# Altium PCB SmallHandheldRev1.PcbDoc (part 1 of 2)
Units mm, origin at the board's own origin, x right, y up, seen from the top; angles counter-clockwise.
Board outline 50.04 x 64.01 mm, 6 copper layers (TopLayer, MidLayer1, MidLayer2, MidLayer3, MidLayer4, BottomLayer); 248 components, 164 nets, 692 pads, 230 vias.
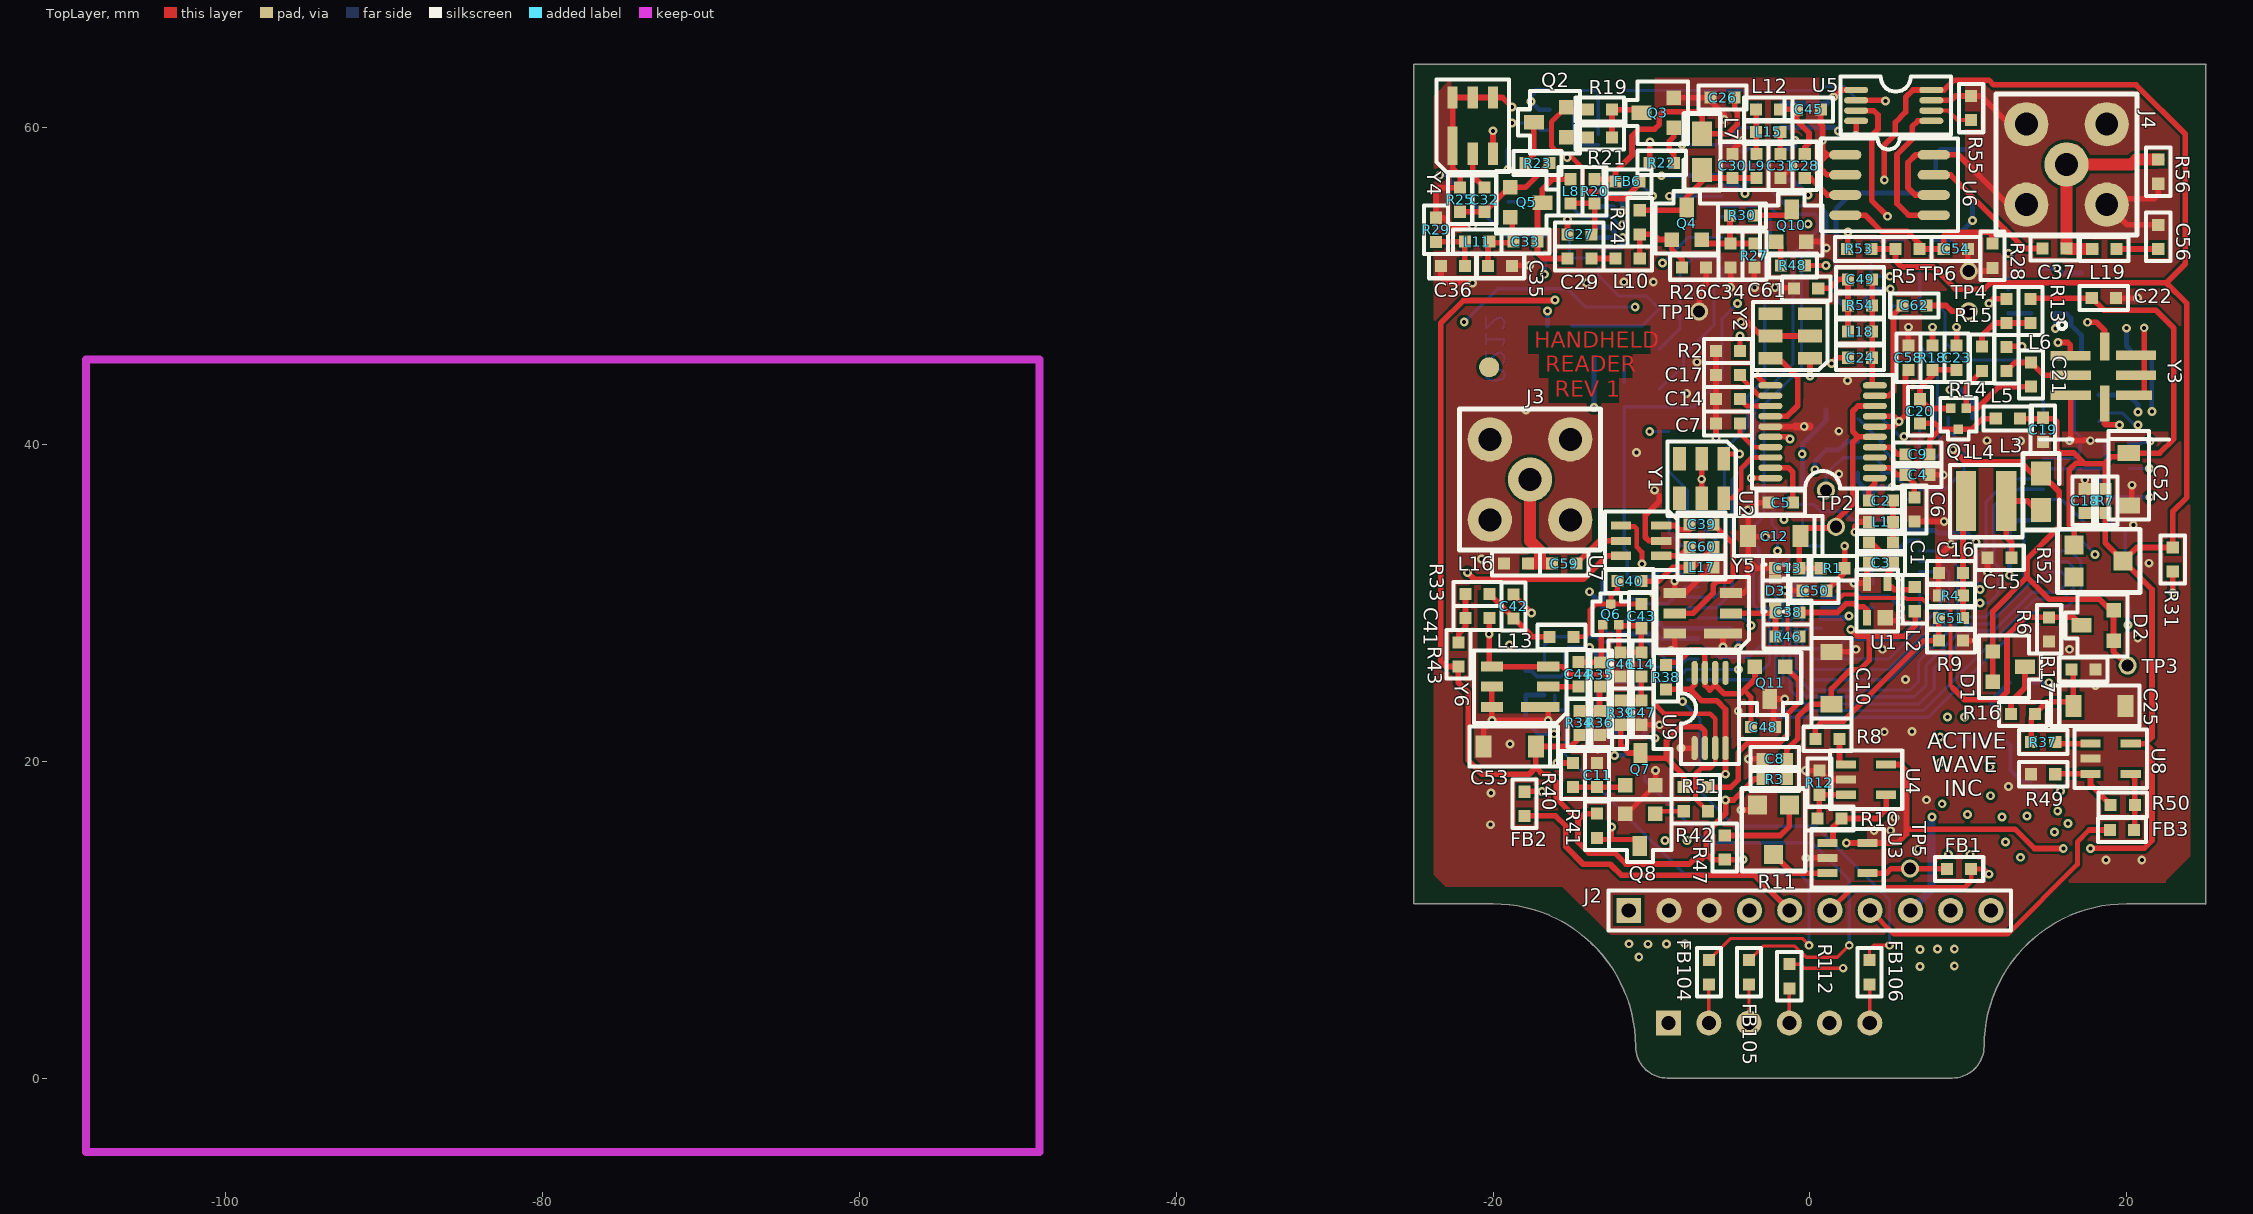
[diagram p0: TopLayer view]
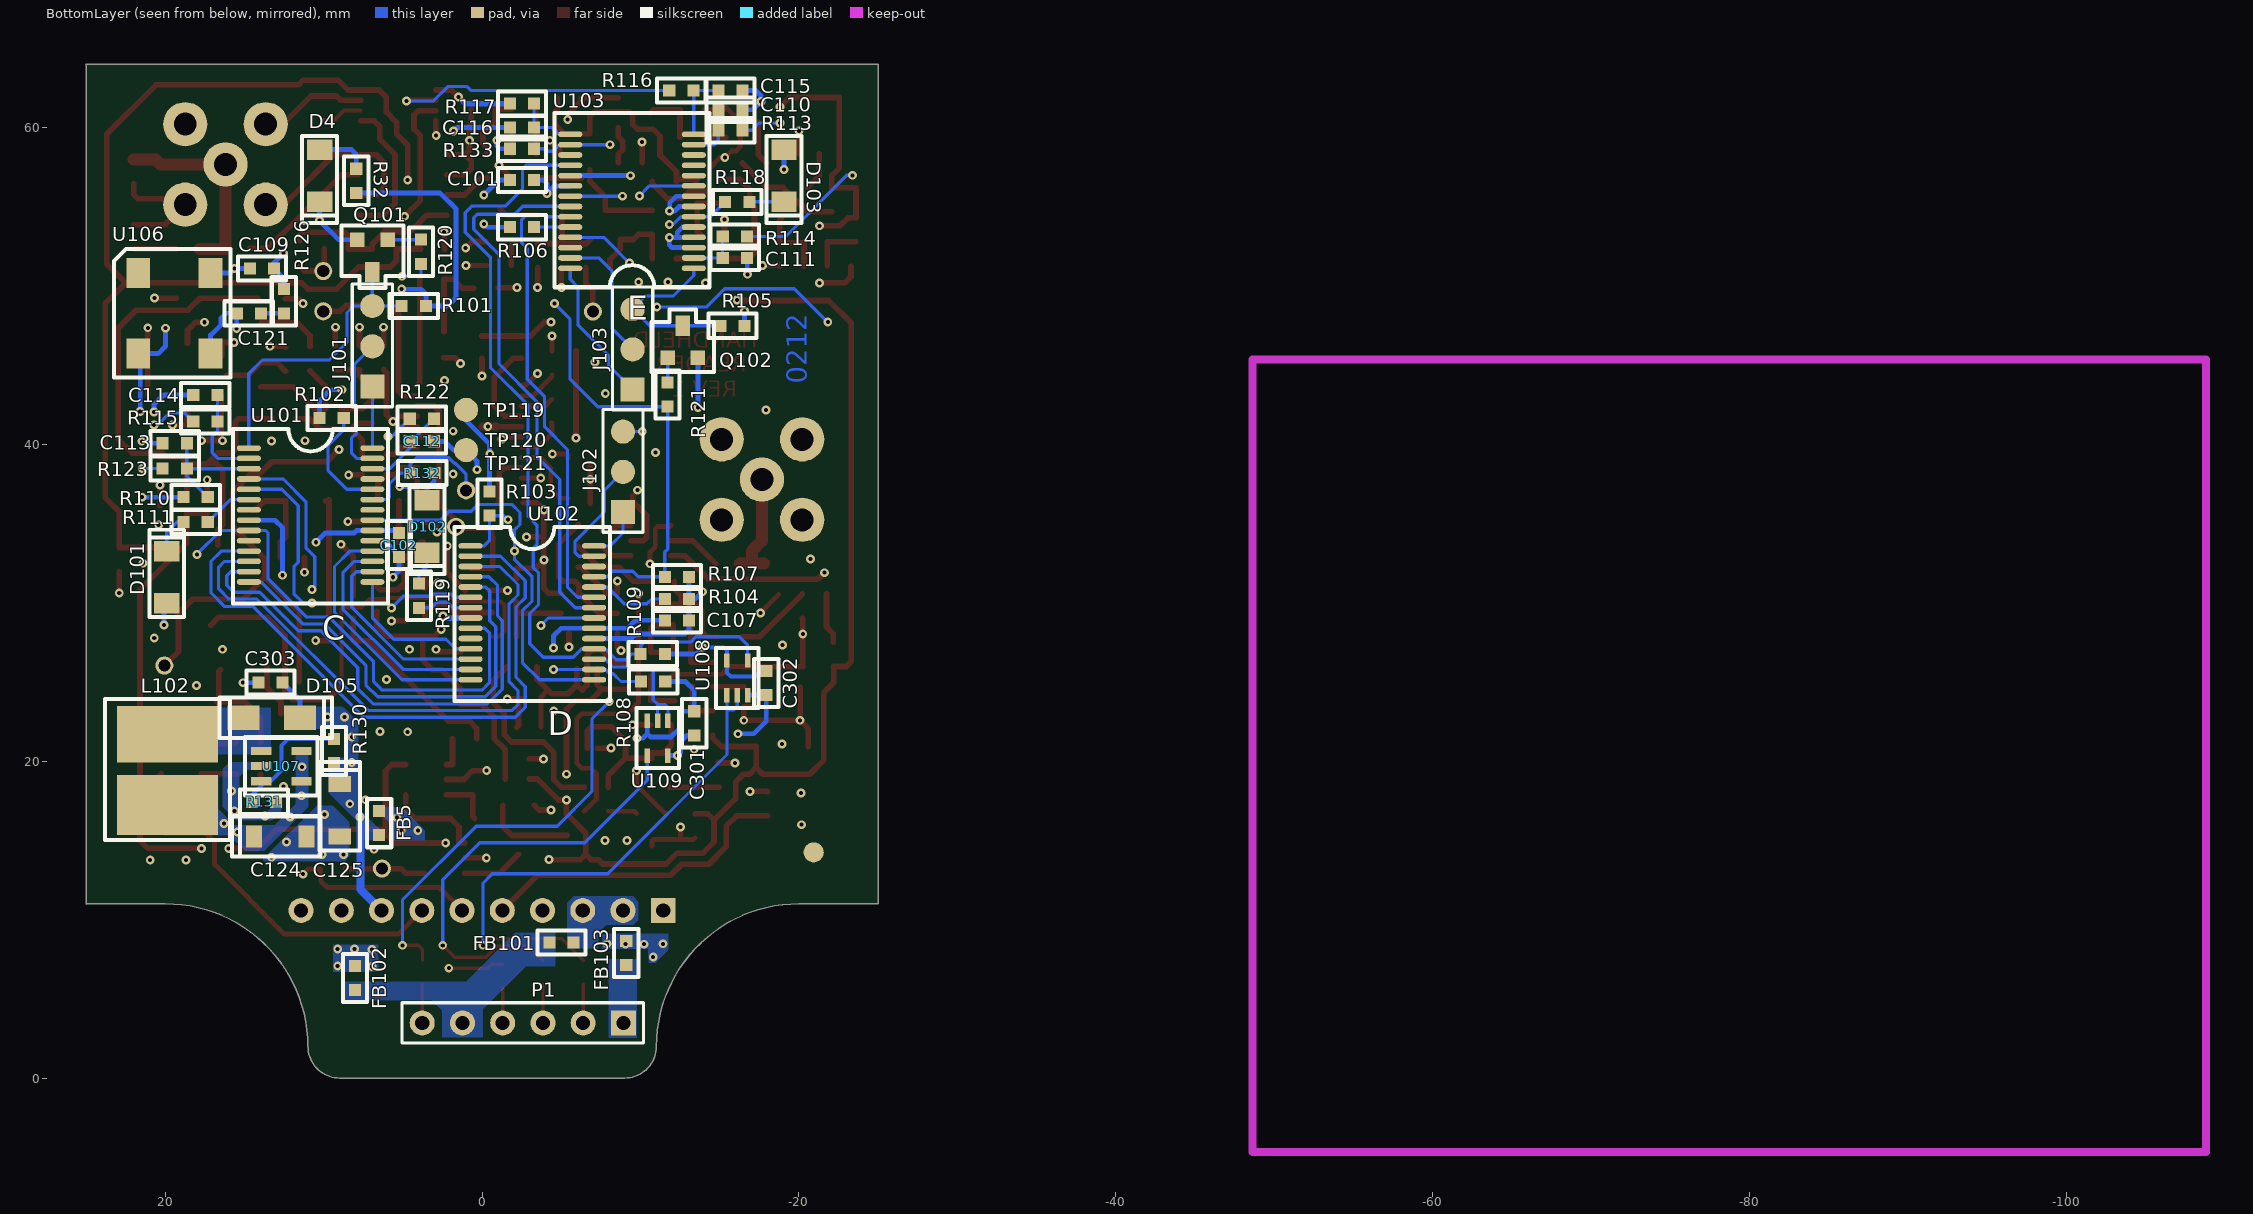
[diagram p1: BottomLayer view, seen from below]
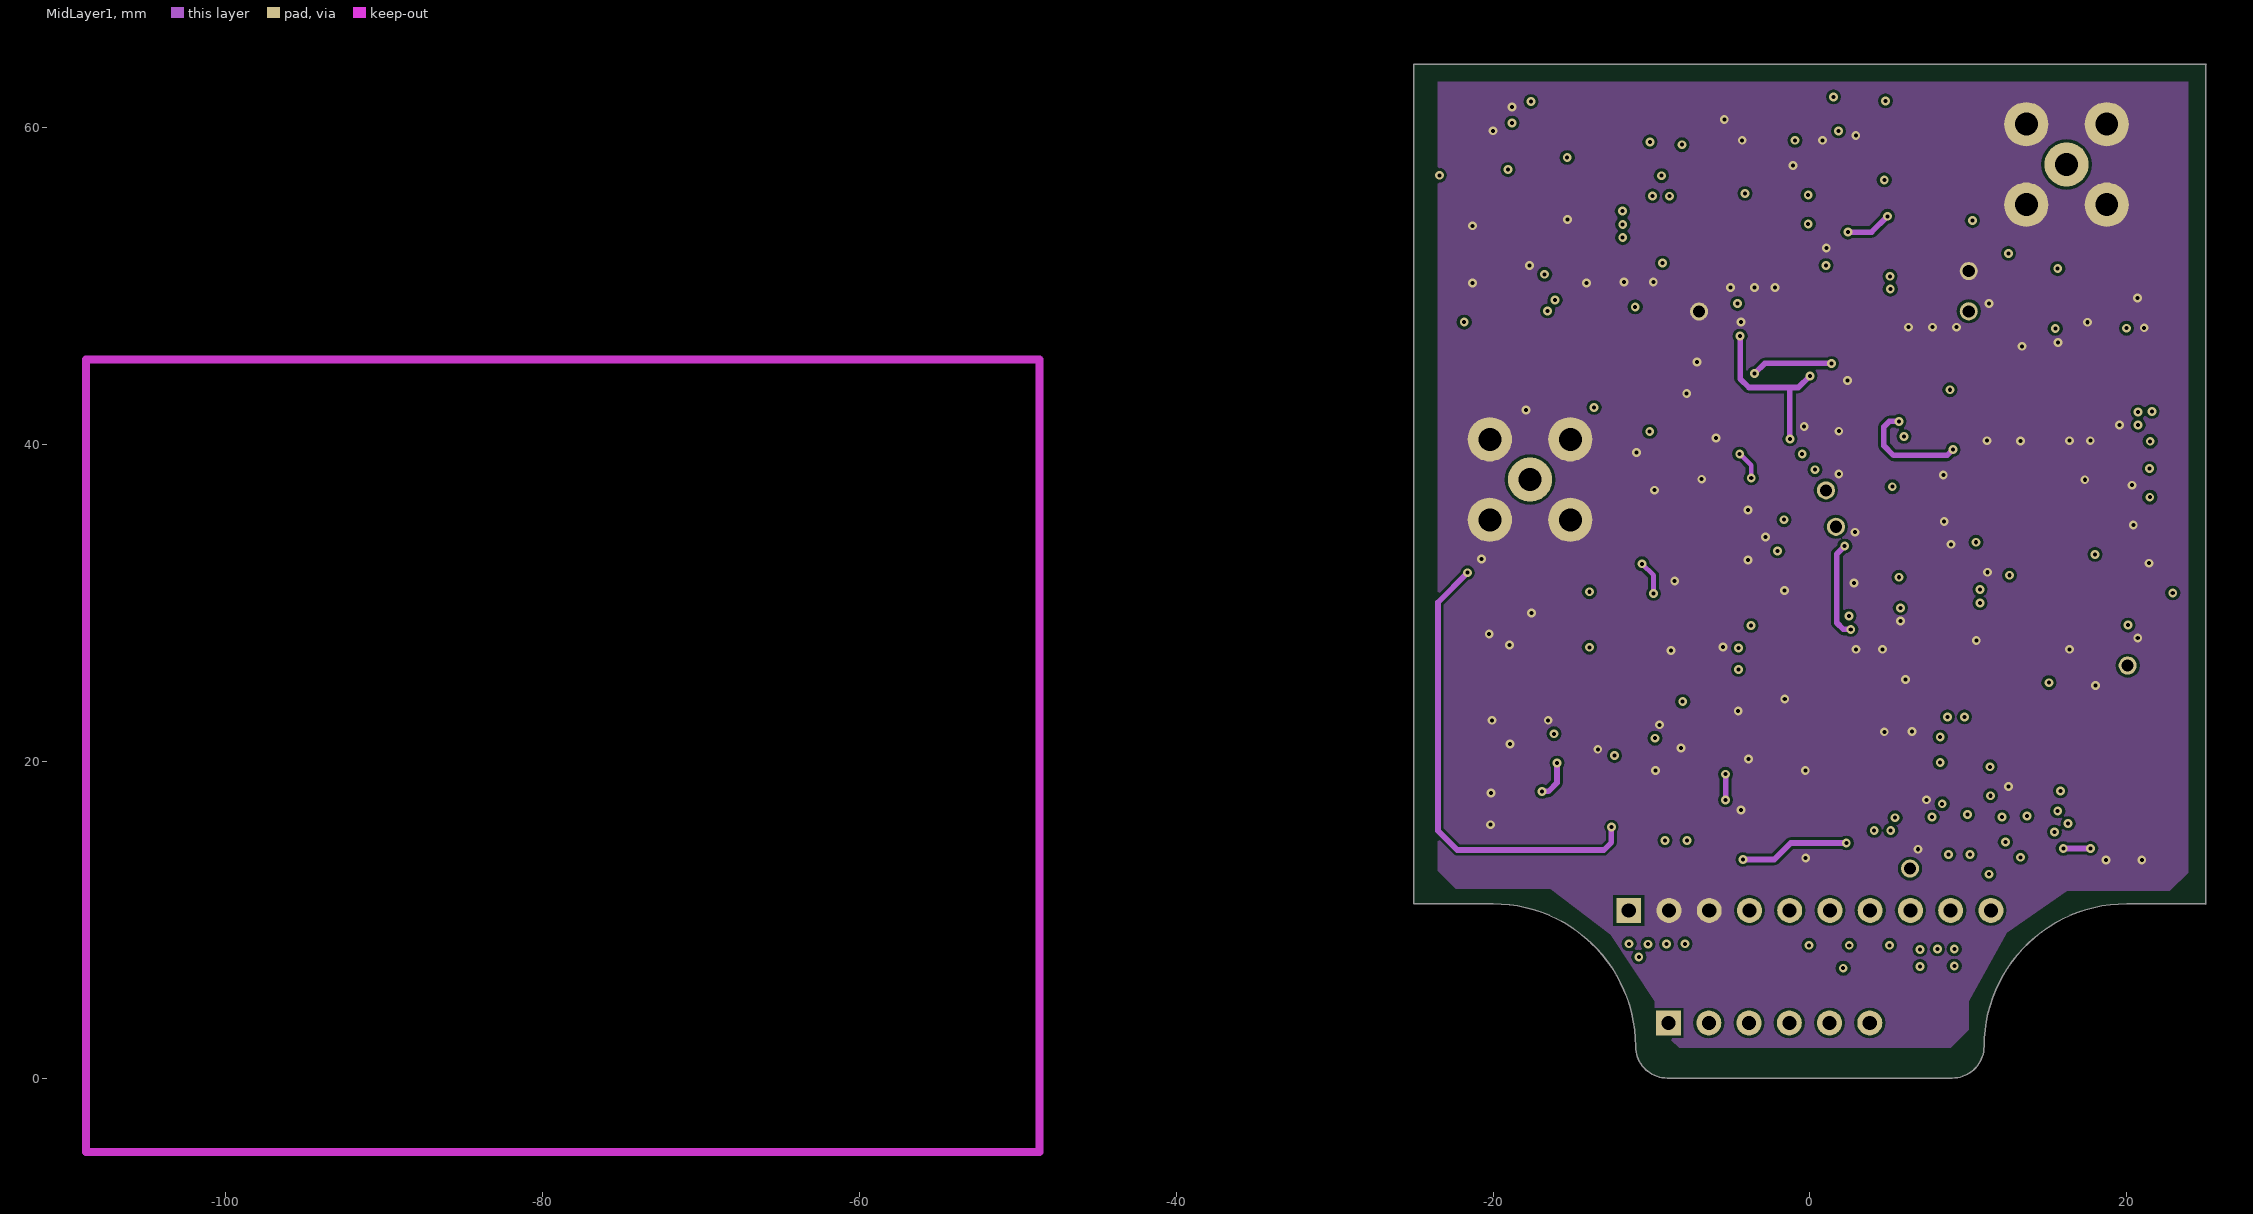
[diagram p2: MidLayer1]
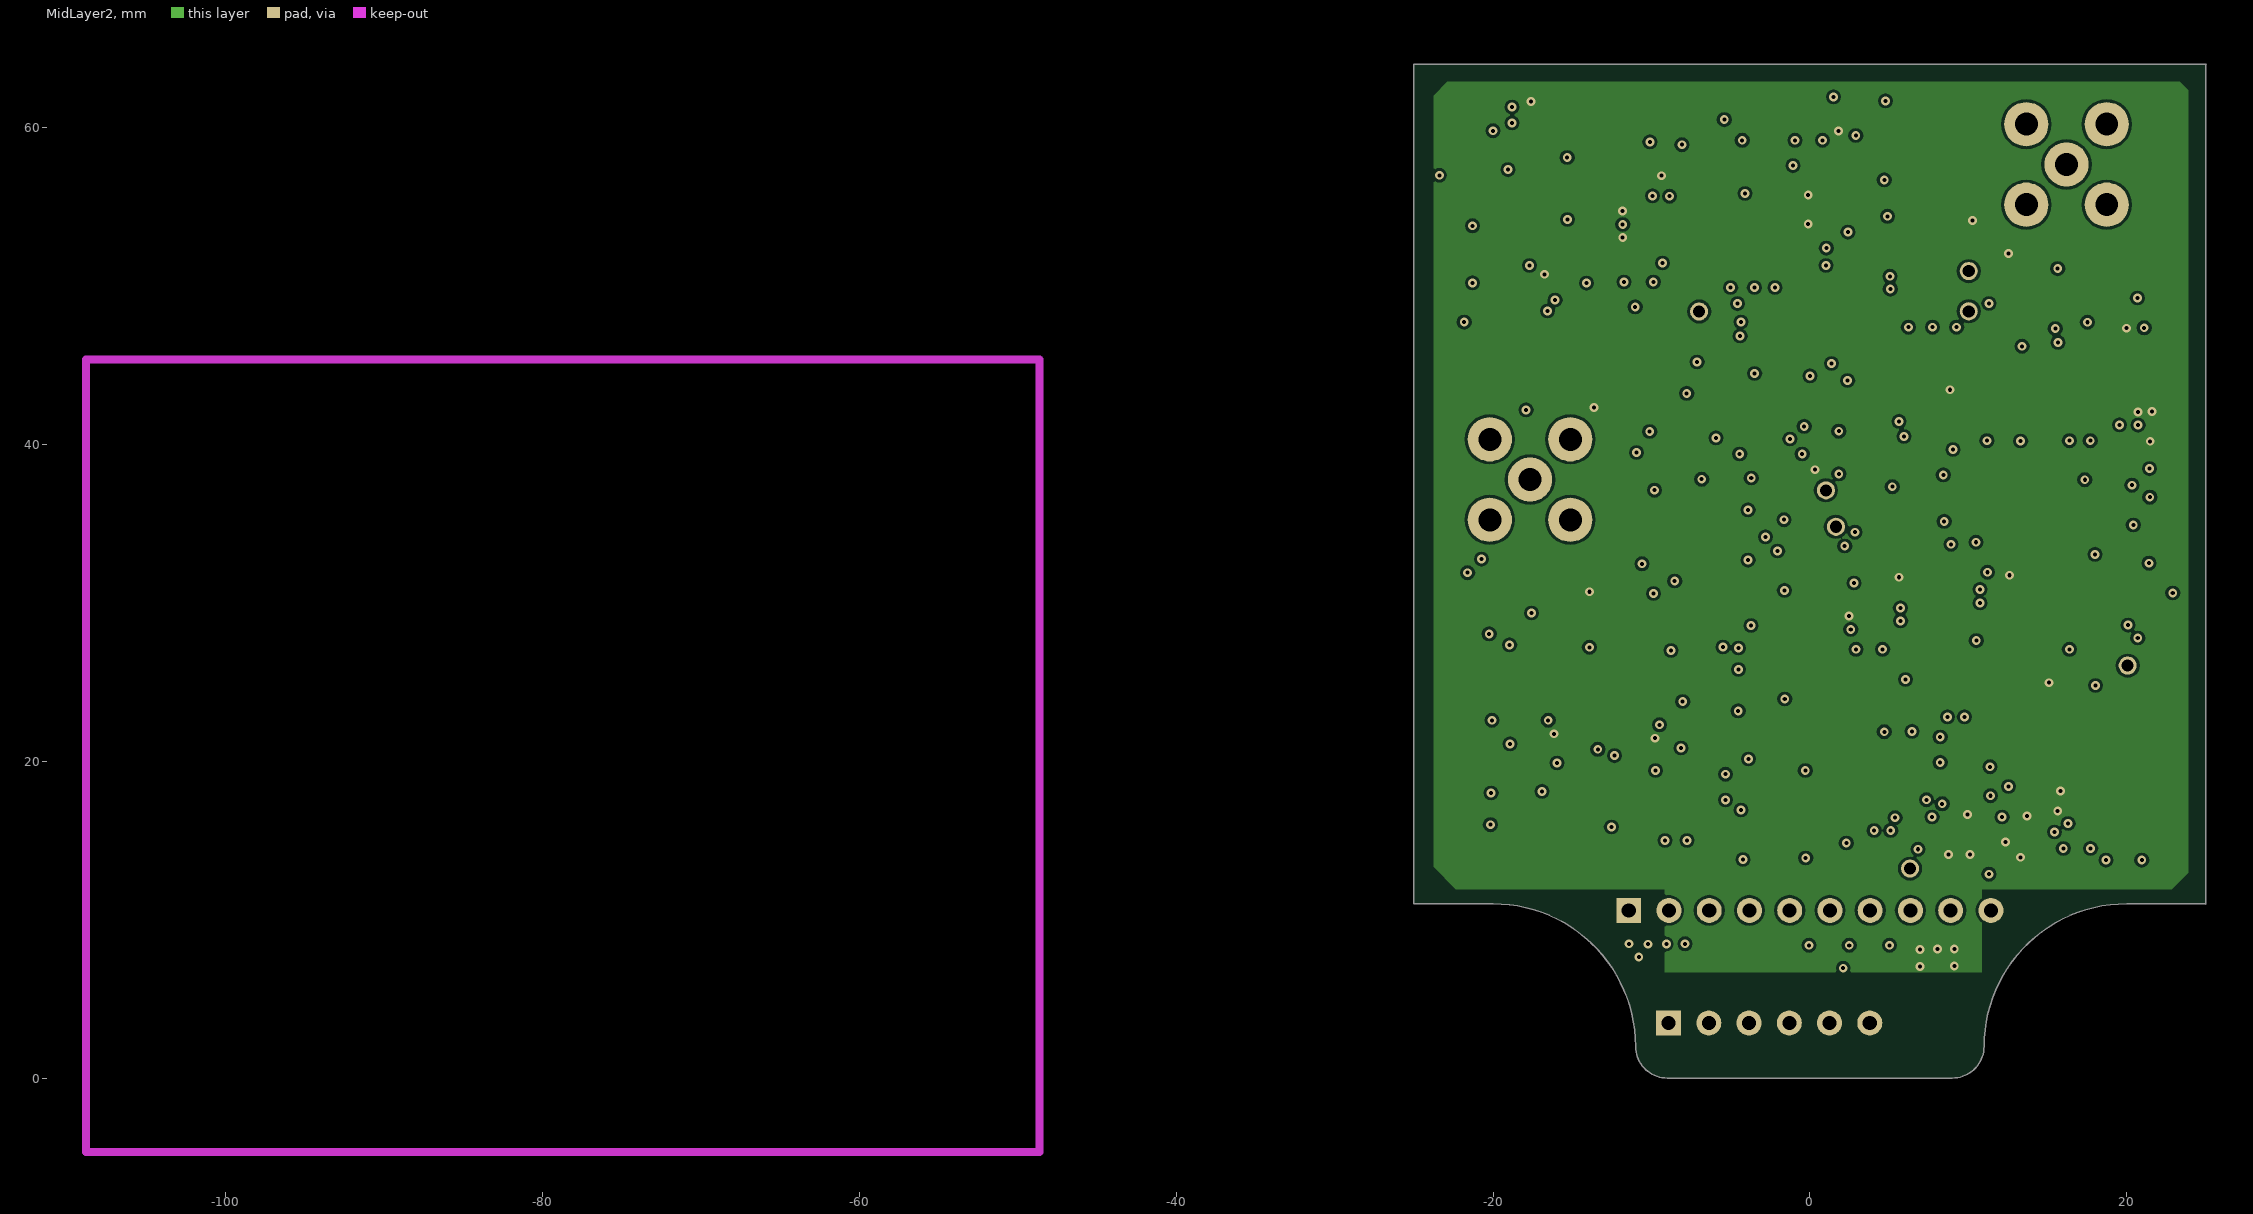
[diagram p3: MidLayer2]
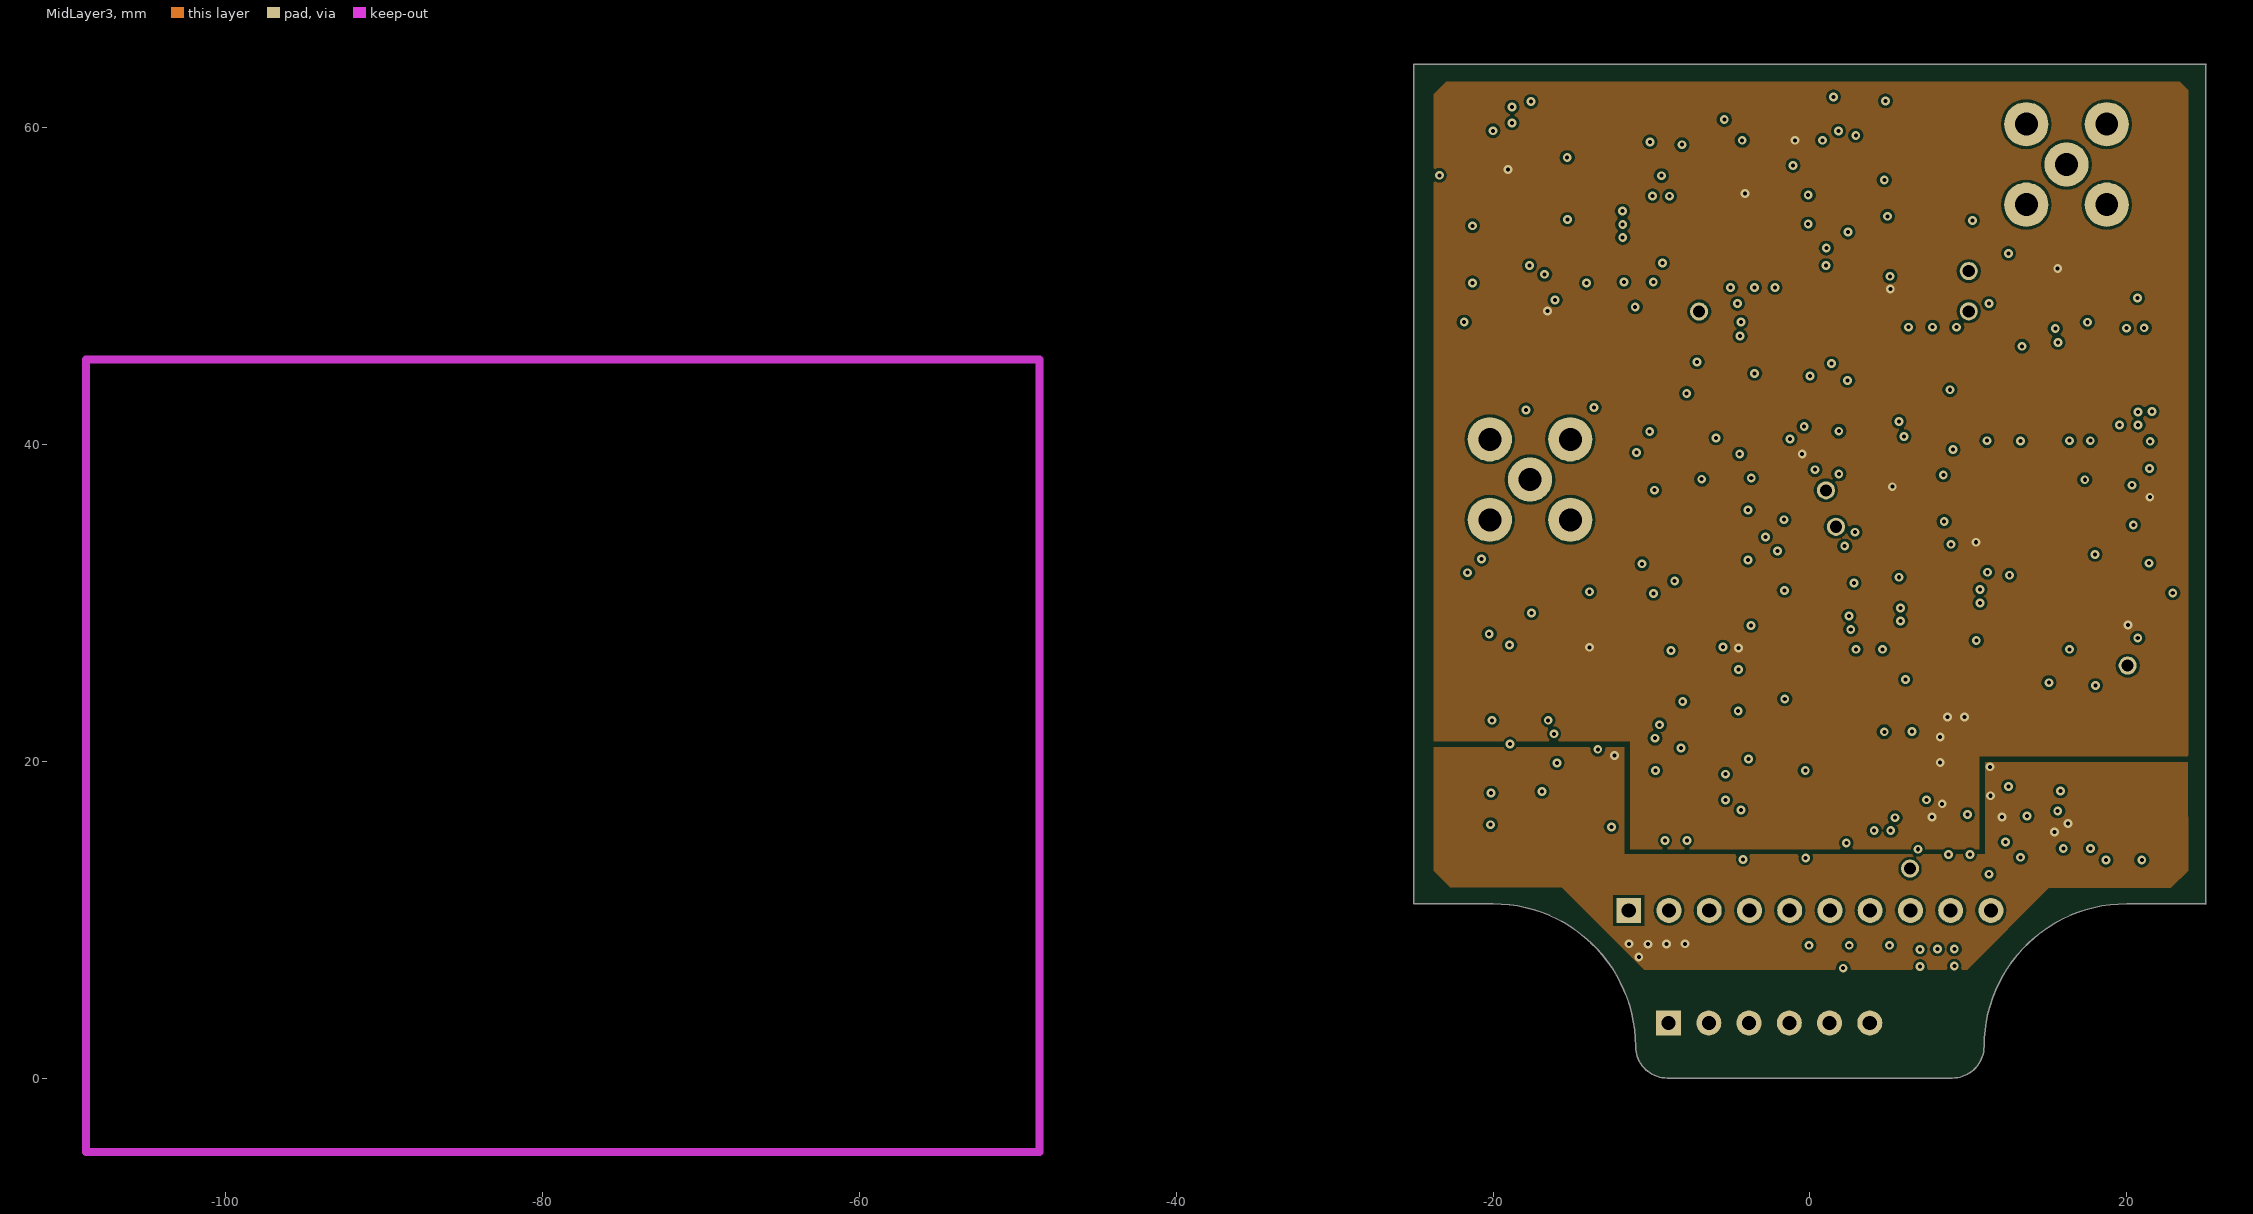
[diagram p4: MidLayer3]
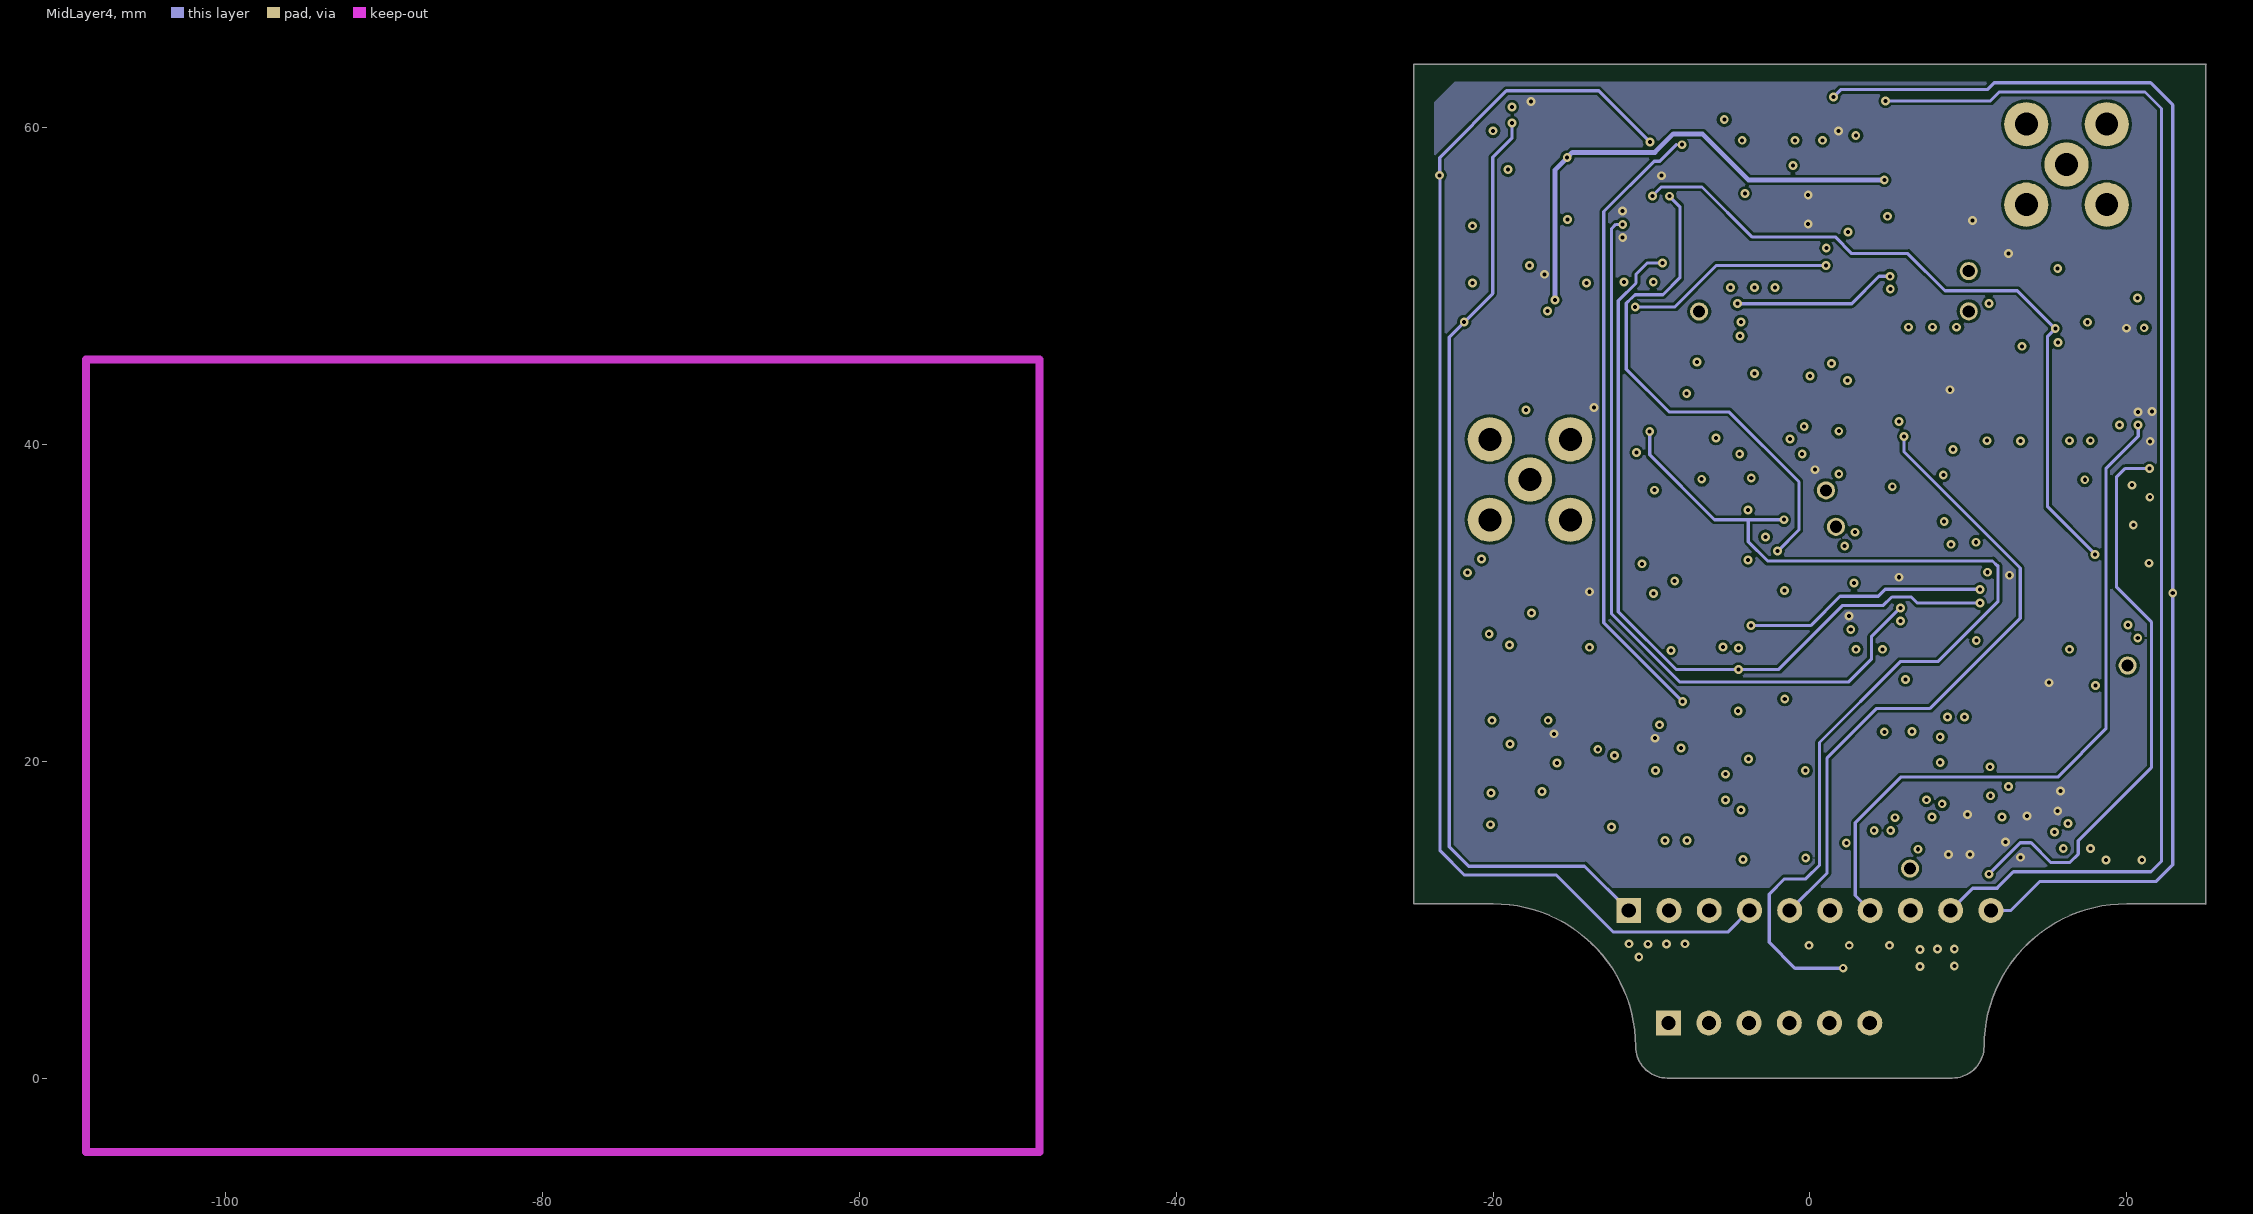
[diagram p5: MidLayer4]

## Layer stack, top to bottom
TopLayer: signal copper 0.0356
Dielectric: core 0.32, FR-4, Dk 4.8
MidLayer1: signal copper 0.0356
Dielectric: prepreg 0.32, FR-4, Dk 4.8
MidLayer2: signal copper 0.0356
Dielectric: core 0.32, FR-4, Dk 4.8
MidLayer3: signal copper 0.0356
Dielectric: prepreg 0.32, FR-4, Dk 4.8
MidLayer4: signal copper 0.0356
Dielectric: core 0.32, FR-4, Dk 4.8
BottomLayer: signal copper 0.0356

## Board outline
-11,2 ccw(c-20,2) -20,11 -25.019,11 -25.019,64 25.019,64 25,64.008 25,10.979 25.006,11 20,11 ccw(c20,2) 11,2 cw(c9,2) 9,0 -9,0 cw(c-9,2)

## Design rules (kind name [scope] priority, off if disabled: settings)
Clearance Clearance_1 [InNet('GND_SIGNAL')] p1 off: gap=0.254
Clearance [All] p2: gap=0.178
ComponentClearance [All] p1 off: gap=0.254 collisioncheckmode=3 verticalgap=0.254 showdistances=FALSE
MinimumSolderMaskSliver [All] p1: minsoldermaskwidth=0.127
PolygonConnect [All] p1: connectstyle=Direct reliefconductorwidth=0.254 reliefentries=4 polygonreliefangle="90 Angle"
RoomDefinition "PG06_Schematic Sheet4" [InComponentClass('PG06_Schematic Sheet4')] p1: confinementstyle=ConfineIn formatcopy=TRUE lockcomponents=FALSE outline -43.663,-11.516 40.234,-11.516 40.234,91.685 -43.663,91.685
RoomDefinition "PG05_Schematic Sheet3" [InComponentClass('PG05_Schematic Sheet3')] p2: confinementstyle=ConfineIn formatcopy=TRUE lockcomponents=FALSE outline 26.128,6.274 31.128,6.274 31.128,12.474 26.128,12.474
RoomDefinition "PG04_Schematic Sheet2" [InComponentClass('PG04_Schematic Sheet2')] p3: confinementstyle=ConfineIn formatcopy=TRUE lockcomponents=FALSE outline -43.6,-11 40,-11 40,91.8 -43.6,91.8
RoomDefinition "PG03_Schematic Sheet1" [InComponentClass('PG03_Schematic Sheet1')] p4: confinementstyle=ConfineIn formatcopy=TRUE lockcomponents=FALSE outline 26.128,-2.026 29.528,-2.026 29.528,7.474 26.128,7.474
RoutingLayers [All] p1: top layer_v5=TRUE mid layer 1_v5=FALSE mid layer 2_v5=FALSE mid layer 3_v5=FALSE mid layer 4_v5=FALSE bottom layer_v5=TRUE
RoutingVias RoutingVias_1 [All] p1: holewidth=0.254 width=0.559 viastyle="Through Hole" minholewidth=0.254 minwidth=0.559 maxholewidth=0.254 maxwidth=0.559
SilkscreenOverComponentPads [All] p1: minsilkscreentomaskgap=0.254
SolderMaskExpansion [All] p1: expansion=0.102
TestPointUsage [All] p1: valid=0 allowmultiple=FALSE
Testpoint [All] p1: side=3 testpointundercomponent=TRUE minsize=1.016 maxsize=2.54 preferedsize=1.524 minholesize=0.508 maxholesize=1.016 preferedholesize=0.813 testpointgrid=0.025 style=297 order=0-112345678
Width [All] p1: maxlimit=2.54 minlimit=0.203 preferedwidth=0.254
20 further rules are at their usual default settings.

## Classes and differential pairs
component class "PG06_Schematic Sheet4": C101 C102 C107 C109 C110 C111 C112 C113 C114 C115 C116 C121 C124 C125 C301 C302 C303 D4 D101 D102 D103 D105 FB5 FB101 FB102 FB103 FB104 FB105 FB106 J101 J102 J103 L102 P1 Q101 Q102 R32 R101 R102 R103 R104 R105 R106 R107 R108 R109 R110 R111 R112 R113 R114 R115 R116 R117 R118 R119 R120 R121 R122 R123 R126 R130 R131 R132 R133 TP118 TP119 TP120 TP121 U101 U102 U103 U106 U107 U108 U109
component class "PG03_Schematic Sheet1": C1 C2 C3 C4 C5 C6 C7 C8 C9 C10 C12 C13 C14 C15 C16 C17 C18 C19 C20 C21 C22 C23 C24 C25 C49 C50 C51 C52 C58 C61 C62 D1 D2 L1 L2 L3 L4 L5 L6 L18 Q1 R1 R2 R3 R4 R6 R7 R8 R9 R10 R11 R12 R13 R14 R15 R16 R17 R18 R37 R47 R49 R50 R52 R54 TP1 TP2 TP3 TP4 TP5 TP6 U1 U2 U3 U4 U8 Y1 Y2 Y3
component class "PG04_Schematic Sheet2": C26 C27 C28 C29 C30 C31 C32 C33 C34 C35 C36 C37 C45 C54 C56 FB1 FB2 FB3 FB6 J2 J4 L7 L8 L9 L10 L11 L12 L15 L19 Q2 Q3 Q4 Q5 Q10 R5 R19 R20 R21 R22 R23 R24 R25 R26 R27 R28 R29 R30 R31 R48 R53 R55 R56 U5 U6 Y4
component class "PG05_Schematic Sheet3": C11 C38 C39 C40 C41 C42 C43 C44 C46 C47 C48 C53 C59 C60 D3 J3 L13 L14 L16 L17 Q6 Q7 Q8 Q11 R33 R34 R35 R36 R38 R39 R40 R41 R42 R43 R46 R51 U7 U9 Y5 Y6

## Components (designator, comment, footprint, x,y, rotation, side; value= is the part's Value field where it differs from the comment)
C1 "27 pF" 0603 3.726,33.81 r0 top
C2 "0.1uF" 0603 5.25,36.452 r180 top
C3 "5 pF" 0603 5.25,32.515 r180 top
C4 "0.1uF" 0603 7.562,38.077 r180 top
C5 ".1uF" 0603 -1.074,36.325 r180 top
C6 "100 pF" 0603 6.596,35.131 r90 top
C7 ".1uF" 0603 -4.402,41.33 r180 top
C8 ".1uF" 0603 -1.455,20.145 r180 top
C9 "0.5 pF" 0603 7.562,39.373 r180 top
C10 "10uF" "CAP A CASE" 1.364,23.599 r90 top
C11 "33 pF" 0603 -13.432,18.364 r90 top
C12 "10uF" "CAP A CASE" -0.592,34.217 r180 top
C13 ".1uF" 0603 -0.668,32.185 r180 top
C14 ".1uF" 0603 -4.402,42.854 r180 top
C15 "0.22" 0603 11.219,32.845 r0 top
C16 "0.001uF" 0603 8.146,31.88 r0 top
C17 ".1uF" 0603 -4.402,44.378 r180 top
C18 ".1uF" 0603 17.357,35.674 r90 top
C19 "22 pF" 0603 14.707,41.681 r270 top
C20 "0.5 pF" 0603 6.952,41.329 r90 top
C21 "100 pF" 0603 13.969,43.646 r90 top
C22 ".1uF" 0603 17.798,49.236 r0 top
C23 "3 pF" 0603 9.268,44.707 r90 top
C24 "1pF" 0603 3.934,45.469 r180 top
C25 "10uF" "CAP A CASE" 16.634,23.498 r0 top
C26 ".1uF" 0603 -4.75,61.89 r180 top
C27 "10 pF" 0603 -15.311,53.258 r0 top
C28 "4 pF" 0603 -0.318,56.82 r90 top
C29 "47 pF" 0603 -13.787,51.734 r180 top
C30 "10 pF" 0603 -4.89,56.82 r90 top
C31 "5 pF" 0603 -1.842,58.344 r270 top
C32 "100 pF" 0603 -20.543,56.213 r270 top
C33 "2 pF" 0603 -18.714,52.801 r0 top
C34 "100 pF" 0603 -5.017,52.68 r270 top
C35 "7 PF" 0603 -18.79,51.252 r180 top
C36 "100 pF" 0603 -21.762,51.252 r180 top
C37 "47 pF" 0603 16.205,52.365 r180 top
C38 "100 pF" 0603 -2.167,29.391 r0 top
C39 "100 pF" 0603 -7.598,34.953 r0 top
C40 "47 pF" 0603 -10.625,31.372 r180 top
C41 ".001uF" 0603 -21.738,29.032 r0 top
C42 "33 pF" 0603 -18.716,29.006 r90 top
C43 "3 pF" 0603 -10.638,29.921 r270 top
C44 "100 pF" 0603 -14.605,26.254 r270 top
C45 "3 pF" 0603 -0.824,61.147 r0 top
C46 "6 pF" 0603 -11.959,26.873 r270 top
C47 "100 pF" 0603 -10.638,22.301 r90 top
C48 ".1uF" 0603 -3.716,22.152 r0 top
C49 "39pF" 0603 3.934,50.422 r180 top
C50 ".1uF" 0603 1.059,30.762 r180 top
C51 ".1uF" 0603 8.146,29.035 r0 top
C52 "10uF" "CAP A CASE" 20.135,39.449 r270 top
C53 "10uF" "CAP A CASE" -17.293,20.929 r180 top
C54 ".1uF" 0603 8.455,52.34 r0 top
C56 "4.7pF" 0603 21.996,52.34 r90 top
C58 "1000pF" 0603 6.22,46.231 r270 top
C59 "15 pF" 0603 -16.264,32.472 r0 top
C60 "6.5 pF" 0603 -7.595,33.528 r0 top
C61 ".1uF" 0603 0.533,49.851 r180 top
C62 ".1uF" 0603 7.363,48.771 r180 top
C101 "0.1uF" 0603 -3.277,56.683 r0 bottom
C102 "0.1uF" 0603 5.258,34.408 r270 bottom
C107 "0.1uF" 0603 -11.532,28.896 r180 bottom
C109 "0.1uF" 0603 14.656,51.095 r180 bottom
C110 "47pF" 0603 -14.91,61.128 r180 bottom
C111 "47pF" 0603 -15.189,51.781 r180 bottom
C112 "47pF" 0603 4.572,40.199 r180 bottom
C113 "47pF" 0603 18.644,40.072 r0 bottom
C114 "47pF" 0603 16.713,43.12 r0 bottom
C115 "47pF" 0603 -14.91,62.348 r180 bottom
C116 "47pF" 0603 -3.277,60.011 r0 bottom
C121 "100pF" 0603 15.494,48.276 r180 bottom
C124 "4.7uF" "CAP A CASE" 14.402,15.256 r180 bottom
C125 "10uF" "CAP A CASE" 8.992,18.558 r270 bottom
C301 "0.1UF" 0603 -13.386,21.631 r90 bottom
C302 "0.1UF" 0603 -17.932,25.695 r270 bottom
C303 "0.1UF" 0603 12.598,24.959 r0 bottom
D1 "1N914" "SOT23 DIODE" 11.554,26.927 r270 top
D2 "1N914" "SOT23 DIODE" 19.174,27.613 r90 top
D3 "BAR 65" "DIODE SC79" -2.184,30.75 r270 top
D4 "BLED" 404-1032-2-ND 10.262,56.963 r90 bottom
D101 "RLED" 404-1032-2-ND 19.914,31.614 r270 bottom
D102 "BLED" 404-1032-2-ND 3.48,34.814 r90 bottom
D103 "GLED" 404-1032-2-ND -19.05,56.963 r90 bottom
D105 "MBR0520" SOD123_021405 13.284,22.749 r0 bottom
FB1 "FB" 0603 8.661,13.199 r0 top
FB2 "FB" 0603 -18.009,18.075 r270 top
FB3 "FB" 0603 20.472,15.662 r180 top
FB5 "FB" 0603 6.502,15.332 r90 bottom
FB6 "FB" 0603 -10.744,56.607 r180 top
FB101 "FB" 0603 -5.766,8.55 r0 bottom
FB102 "FB" 0603 8.026,7.077 r270 bottom
FB103 "FB" 0603 -9.093,8.652 r270 bottom
FB104 "FB" 0603 -6.375,7.442 r270 top
FB105 "FB" 0603 -3.835,7.442 r270 top
FB106 "FB" 0603 3.759,7.442 r270 top
J2 "CON10" "1X10 HEADER" -11.43,10.582 r0 top
J3 "SMA ANT" "50 OHM ANT" -17.661,37.781 r90 top
J4 "SMA ANT" "50 OHM ANT" 16.205,57.674 r270 top
J101 "1X3 HEADER" "1X3 HEADER TEST PADS" 6.934,43.653 r90 bottom
J102 "1X3 HEADER" "1X3 HEADER TEST PADS" -8.89,35.728 r90 bottom
J103 "1X3 HEADER" "1X3 HEADER TEST PADS" -9.5,43.459 r90 bottom
L1 "4.7nH" 0603 5.25,35.106 r180 top
L2 "8.2nH" 0603 6.622,30.991 r270 top
L3 "6.8 uH" 0805 14.602,35.868 r90 top
L4 "2.2 mH" "COIL TKS5540CT-ND" 11.13,36.426 r90 top
L5 "5.6nh" 0603 13.259,41.631 r180 top
L6 "???" 0603 12.413,44.621 r90 top
L7 "330 nH" 0805 -6.795,59.614 r270 top
L8 "47 nH" 0603 -15.107,55.214 r90 top
L9 "6.8 nH" 0603 -3.366,56.82 r90 top
L10 "47 nH" 0603 -12.263,51.734 r0 top
L11 "100 nH" 0603 -20.238,52.801 r180 top
L12 "22nH" 0603 -3.39,61.147 r0 top
L13 "18nh" 0603 -16.434,27.854 r0 top
L14 "0.18uH" 0603 -10.638,25.349 r90 top
L15 "6.8 nH" 0603 -3.39,59.724 r0 top
L16 "3.3nH" 0603 -17.783,32.486 r180 top
L17 "4.7nH" 0603 -6.074,32.235 r180 top
L18 "5.6uH" 0603 3.934,47.12 r180 top
L19 "5.6 nH" 0603 19.355,52.34 r180 top
L102 "2.2uH" "COIL BOURNS SDR7030-330M" 19.863,19.472 r90 bottom
P1 "Header 6" "1X6 HEADER" -8.915,3.48 r0 bottom
Q1 "NE85619" "3 PIN ULTRA SUPER MINI MOLD" 8.882,42.268 r270 top
Q2 "2N3906" "SOT23 TRANS" -15.387,59.38 r90 top
Q3 "2N3904" "SOT23 TRANS" -8.584,59.977 r90 top
Q4 "BFR193" "SOT23 TRANS" -8.726,52.934 r0 top
Q5 "BFR193" "SOT23 TRANS" -18.917,56.23 r270 top
Q6 "NE85619" "3 PIN ULTRA SUPER MINI MOLD" -12.061,28.625 r90 top
Q7 "2N3904" "SOT23 TRANS" -11.654,18.491 r0 top
Q8 "2N3904" "SOT23 TRANS" -9.761,16.691 r180 top
Q10 "2N3904" "SOT23 TRANS" -2.12,52.807 r0 top
Q11 "2N3906" "SOT23 TRANS" -1.557,25.962 r180 top
Q101 "2N3904" "SOT23 TRANS" 5.969,52.924 r0 bottom
Q102 "2N3904" "SOT23 TRANS" -11.709,45.457 r180 bottom
R1 "56" 0603 2.202,32.185 r180 top
R2 "330" 0603 -4.402,45.902 r180 top
R3 "22" 0603 -1.455,18.875 r180 top
R4 "470" 0603 8.146,30.457 r0 top
R5 "3.3K" 0603 5.407,52.34 r0 top
R6 "10K" 0603 15.11,29.086 r270 top
R7 "560" 0603 18.652,37.198 r270 top
R8 "1K" 0603 0.348,21.415 r0 top
R9 "150K" 0603 8.146,27.613 r0 top
R10 "100K" 0603 0.475,16.386 r0 top
R11 "5K POT" "POT PANA EVN5" -2.294,15.624 r180 top
R12 "10K" 0603 0.602,17.884 r90 top
R13 "6.8K" 0603 13.937,49.185 r270 top
R14 "4.7K" 0603 10.871,44.644 r90 top
R15 "39K" 0603 12.413,47.661 r90 top
R16 "10" 0603 14.221,22.99 r180 top
R17 "220 K" 0603 16.507,25.784 r0 top
R18 "1K" 0603 7.744,46.231 r270 top
R19 "4.7K" 0603 -14.015,61.132 r0 top
R20 "22" 0603 -13.583,56.738 r270 top
R21 "2.2K" 0603 -12.491,59.38 r180 top
R22 "4.7K" 0603 -8.585,57.776 r180 top
R23 "3.3K" 0603 -17.95,57.762 r0 top
R24 "2.7K" 0603 -10.739,54.782 r270 top
R25 "3.3K" 0603 -22.075,54.689 r90 top
R26 "1K" 0603 -8.065,51.156 r0 top
R27 "220" 0603 -3.493,52.68 r270 top
R28 "5.6K" 0603 11.532,52.67 r270 top
R29 "180" 0603 -23.591,52.784 r90 top
R30 "100" 0603 -3.519,54.458 r180 top
R31 "100K" 0603 22.911,33.493 r270 top
R32 "330" 0603 7.95,57.404 r270 bottom
R33 "22" 0603 -20.214,30.556 r180 top
R34 "6.8K" 0603 -14.55,21.657 r90 top
R35 "4.7K" 0603 -13.259,26.229 r270 top
R36 "39K" 0603 -13.259,23.181 r270 top
R37 "1K" 0603 13.967,21.212 r0 top
R38 "10K" 0603 -9.075,26.063 r270 top
R39 "68" 0603 -11.934,22.301 r90 top
R40 "4.7K" 0603 -14.956,19.888 r270 top
R41 "10K" 0603 -13.444,15.167 r90 top
R42 "4.7K" 0603 -7.958,16.843 r0 top
R43 "22" 0603 -22.174,25.984 r90 top
R46 "2.2K" 0603 -0.643,27.867 r180 top
R47 "15K" 0603 -5.369,15.311 r270 top
R48 "1K" 0603 -1.829,51.299 r0 top
R49 "10K" 0603 15.491,19.18 r180 top
R50 "56K" 0603 18.992,17.249 r0 top
R51 "4.7K" 0603 -7.958,18.367 r0 top
R52 "5K POT" "POT PANA EVN5" 18.285,32.642 r270 top
R53 "10K" 0603 2.359,52.34 r0 top
R54 "8.2K" 0603 2.41,48.771 r0 top
R55 "1K" 0603 10.185,61.992 r270 top
R56 "50" 0603 21.996,56.455 r90 top
R101 "10K" 0603 3.556,48.733 r0 bottom
R102 "10K" 0603 8.738,41.672 r0 bottom
R103 "10K" 0603 -0.457,37.024 r270 bottom
R104 "10K" 0603 -13.056,30.242 r0 bottom
R105 "10K" 0603 -16.561,47.489 r0 bottom
R106 "10K" 0603 -3.277,53.712 r0 bottom
R107 "10K" 0603 -11.532,31.639 r180 bottom
R108 "10K" 0603 -11.557,25.035 r0 bottom
R109 "10K" 0603 -11.532,26.762 r0 bottom
R110 "10K" 0603 18.847,36.668 r180 bottom
R111 "330" 0603 18.847,35.093 r180 bottom
R112 "0" 0603 -1.295,5.664 r90 top
R113 "100" 0603 -16.434,59.833 r0 bottom
R114 "100" 0603 -16.713,53.127 r0 bottom
R115 "100" 0603 18.237,41.443 r180 bottom
R116 "100" 0603 -11.811,62.348 r180 bottom
R117 "100" 0603 -1.753,61.509 r180 bottom
R118 "120" 0603 -16.866,55.313 r0 bottom
R119 "180" 0603 3.988,31.207 r270 bottom
R120 "6.8K" 0603 3.861,51.4 r90 bottom
R121 "6.8K" 0603 -11.709,42.383 r90 bottom
R122 "10" 0603 3.048,41.621 r0 bottom
R123 "10" 0603 20.168,38.472 r180 bottom
R126 "150" 0603 12.522,48.276 r90 bottom
R130 "40.2K" 0603 9.347,21.403 r270 bottom
R131 "13.3K" 0603 13.005,17.44 r0 bottom
R132 "10K" 0603 3.023,38.192 r0 bottom
R133 "10K" 0603 -1.753,58.665 r180 bottom
TP1 "TP" TESTPOINT -6.988,48.39 r180 top
TP2 "TP" TESTPOINT 1.648,34.801 r180 top
TP3 "TP" TESTPOINT 20.063,26.038 r180 top
TP4 "TP" TESTPOINT 10.033,48.403 r180 top
TP5 "TP" TESTPOINT 6.325,13.224 r180 top
TP6 "GND" TESTPOINT 10.033,50.943 r180 top
TP119 "TP" TESTPOINT_SMT 1.016,42.18 r90 bottom
TP120 "TP" TESTPOINT_SMT 1.016,39.64 r90 bottom
TP121 "TP" TESTPOINT 1.016,37.1 r90 bottom
U1 "BGA2001" SOT343 4.26,30.153 r0 top
U2 "SA636DK" SSOP20 4.107,37.874 r90 top
U3 "TLV1391" SOT25 1.11,14.836 r0 top
U4 "LMV821" SOT25 2.278,19.789 r0 top
U5 "DS1804" "SO8 SMALL" 2.924,62.373 r270 top
U6 "AT-113" SO8 2.238,58.284 r0 top
U7 "UPG52TA" TO6 -9.38,32.972 r180 top
U8 "LMV821" SOT25 17.722,21.11 r0 top
U9 "LMC555" "SO8 SMALL" -7.272,20.831 r0 top
U101 "AWI501C" SSOP28 14.732,39.767 r270 bottom
U102 "AWI501D" SSOP28 0.737,33.595 r270 bottom
U103 "AWI501E" SSOP28 -13.36,51.121 r90 bottom
U106 "CRY-16-MHZ" "SMT OSCILLATOR" 21.463,50.816 r270 bottom
U107 "REG LINEAR LT1930" SOT23-5A 13.945,20.641 r180 bottom
U108 "Single And Gate" SC70 -16.104,25.264 r180 bottom
U109 "74VHC1GT08" SC70 -11.074,21.454 r0 bottom
Y1 "10.7 Mhz Filter" FILTER2 -5.426,39.096 r180 top
Y2 "10.7 Mhz Filter" FILTER2 0.01,45.445 r90 top
Y3 "905.8_Resonator" RESONATOR 18.611,44.359 r90 top
Y4 "433.92_Resonator" RESONATOR2 -21.278,60.124 r90 top
Y5 "916.5_MHz Saw Filter" RESONATOR2 -6.752,29.339 r180 top
Y6 "916.5_Resonator" RESONATOR2 -18.288,24.705 r180 top

## Footprints (in the part's own frame and the unit in brackets; to place one, negate y for a bottom-side part, rotate by r counter-clockwise, add the part's x,y. Pads: shape width x height; smd on the part's side, far side on the other; paste and mask are expansions set on the pad)
"1X3 HEADER TEST PADS" [mil]
  rect 60x60 smd: 1(0,0)
  round 60 smd: 2(100,0) 3(200,0)
  silkscreen extent -50,-50 255,50
"1X6 HEADER" [mil]
  rect 62x62 hole 35: 1(0,0)
  round 62 hole 35: 2(100,0) 3(200,0) 4(300,0) 5(400,0) 6(500,0)
  silkscreen extent -50,-50 550,50
"1X10 HEADER" [mil]
  rect 62x62 hole 35: 1(0,0)
  round 62 hole 35: 2(100,0) 3(200,0) 4(300,0) 5(400,0) 6(500,0) 7(600,0) 8(700,0) 9(800,0) 10(900,0)
  silkscreen extent -50,-50 950,50
"3 PIN ULTRA SUPER MINI MOLD" [mm]
  rect 0.6x0.6 smd: B(0,1) C(1.3,0.5) E(0,0)
  silkscreen extent -0.65,-0.65 1.95,1.65
"50 OHM ANT" [mil]
  round 110 hole 57: 1(0,0) 2(-100,100) 3(100,100) 4(100,-100) 5(-100,-100)
  silkscreen extent -175,-175 175,175
404-1032-2-ND [mm]
  rect 1.3x1.6 smd: A(1.65,0) K(-1.65,0)
  silkscreen extent -3,-1.1 2.5,1.1
0603 [mil]
  rect 30x30 smd: 1(0,0) 2(60,0)
  silkscreen extent -30,-30 90,30
0805 [mil]
  rect 60x50 smd: 1(0,0) 2(90,0)
  silkscreen extent -50,-45 140,45
"CAP A CASE" [mil]
  rect 40x55 smd: 1(0,0) 2(130,0)
  silkscreen extent -55,-50 165,50
"COIL BOURNS SDR7030-330M" [mil]
  rect 150x250 smd: 1(-88,0)
  rect 140x250 smd: 2(88,0)
  silkscreen extent -175,-155 175,155
"COIL TKS5540CT-ND" [mm]
  rect 3.81x1.27 smd: 1(0,-1.27) 2(0,1.27)
  silkscreen extent -2.29,-2.29 2.29,2.29
"DIODE SC79" [mil]
  rect 20x30 smd: A(29,0) K(-29,0)
  silkscreen extent -64,-32 53,32
FILTER2 [mm]
  rect 0.8x1.5 smd: 1(0,0) 2(1.4,2.5) 2(1.4,0) 3(2.8,2.5) 3(2.8,0) 4(0,2.5)
  silkscreen extent -0.75,-1.1 3.55,3.6
"POT PANA EVN5" [mm]
  rect 1.2x1.2 smd: 1(-1,-1.6) 2(0,1.5) 3(1,-1.6)
  silkscreen extent -2,-2.65 2,2.55
RESONATOR [mm]
  rect 0.6x2.54 smd: 1(1.245,2.159) 2(0,2.134) 3(-1.27,2.134) 6(0,-1.983) 7(1.27,-1.983)
  rect 2.286x0.6 smd: 4(-1.776,0.008)
  rect 0.6x2.286 smd: 5(-1.27,-1.856)
  rect 1.778x0.6 smd: 8(1.831,0.008)
  silkscreen extent 2.92,2.44 3.43,2.95
RESONATOR2 [mil]
  rect 95x25 smd: 1(-50,50)
  rect 55x25 smd: 2(-70,0) 3(-70,-50) 4(70,-50) 5(70,0) 6(70,50)
  silkscreen extent -115,-90 115,90
SC70 [mm]
  rect 0.35x0.9 smd: 1(-0.65,-1.1) 2(0,-1.1) 3(0.65,-1.1) 4(0.65,1.1) 5(-0.65,1.1)
  silkscreen extent -1.35,-1.89 1.35,1.89
"SMT OSCILLATOR" [mm]
  rect 1.9x1.5 smd: 1(0,-0.254) 2(5.08,-0.254) 3(5.08,4.318) 4(0,4.318)
  silkscreen extent -1.52,-1.78 6.6,5.59
SO8 [mil]
  oval 80x24 smd: 1(0,0) 2(0,-50) 3(0,-100) 4(0,-150) 5(220,-150) 6(220,-100) 7(220,-50) 8(220,0)
  silkscreen extent -60,-190 280,40
"SO8 SMALL" [mil]
  oval 16x60 smd mask+2: 1(0,0) 2(25.59,0) 3(51.18,0) 4(76.77,0) 5(76.77,186.85) 6(51.18,186.85) 7(25.59,186.85) 8(0,186.85)
  silkscreen extent -33,-39 110,236
SOD123_021405 [mil] "SMT"
  rect 80x60 smd: A(70,0) K(-70,0)
  silkscreen extent -150,-50 130,50
"SOT23 DIODE" [mil]
  rect 36x36 smd: A(0,0) A(75,0)
  rect 36x50 smd: K(38,80)
  silkscreen extent -40,-35 115,120
"SOT23 TRANS" [mil]
  rect 36x36 smd: B(0,0) E(75,0)
  rect 36x50 smd: C(38,80)
  silkscreen extent -40,-35 115,120
SOT23-5A [mil]
  rect 50x20 smd: 1(0,0) 2(0,-37) 3(0,-75) 4(100,-75) 5(100,0)
  silkscreen extent -40,-110 140,35
SOT25 [mil]
  rect 50x20 smd: 1(0,0) 2(0,-37) 3(0,-75) 4(100,-75) 5(100,0)
  silkscreen extent -40,-110 140,35
SOT343 [mm]
  rect 1x1 smd: 1(0.5,-1.1)
  rect 0.5x1 smd: 2(-0.65,-1.1) 3(-0.65,1.1) 4(0.65,1.1)
  silkscreen extent -1.3,-1.95 1.3,1.95
SSOP20 [mil]
  oval 16x60 smd mask+2: 1(0,0) 2(25.59,0) 3(51.18,0) 4(76.77,0) 5(102.36,0) 6(127.95,0) 7(153.54,0) 8(179.13,0) 9(204.72,0) 10(230.31,0) 11(230.31,259.84) 12(204.72,259.84) 13(179.13,259.84) 14(153.54,259.84) 15(127.95,259.84) 16(102.36,259.84) 17(76.77,259.84) 18(51.18,259.84) 19(25.59,259.84) 20(0,259.84)
  silkscreen extent -26,-45 256,305
SSOP28 [mil]
  oval 14x60 smd: 1(0,0) 2(25.59,0) 3(51.18,0) 4(76.77,0) 5(102.36,0) 6(127.95,0) 7(153.54,0) 8(179.13,0) 9(204.72,0) 10(230.32,0) 11(255.91,0) 12(281.5,0) 13(307.09,0) 14(332.68,0) 15(332.68,307.09) 16(307.09,307.09) 17(281.5,307.09) 18(255.91,307.09) 19(230.32,307.09) 20(204.72,307.09) 21(179.13,307.09) 22(153.54,307.09) 23(127.95,307.09) 24(102.36,307.09) 25(76.77,307.09) 26(51.18,307.09) 27(25.59,307.09) 28(0,307.09)
  silkscreen extent -47,-39 386,346
TESTPOINT [mil]
  round 45 hole 30: 1(0,0)
TESTPOINT_SMT [mil]
  round 60 smd: 1(0,0)
TO6 [mil]
  rect 50x20 smd: 1(0,-75) 2(0,-37) 3(0,0) 4(100,0) 5(100,-37) 6(100,-75)
  silkscreen extent -40,-110 140,35

## Part data
C1 C2 C3 C4 C5 C6 C7 C8 C9 C10 C11 C12 C13 C14 C17 C18 C19 C20 C21 C22 C23 C24 C30 C31 C32 C34 C36 C38 C39 C40 C41 C42 C43 C44 C46 C47 C48 C49 C50 C59 C60 C61 C62 C301 C302 C303: library part CAP, "Capacitor"
C15 C16 C25 C26 C27 C28 C29 C33 C35 C37 C45 C51 C54 C56 C58: library part CAP_NP
C52 C53 C124 C125: library part "CAPACITOR POL", "Capacitor"
C101 C102 C107 C109: library part C_603
C110 C111 C112 C113 C114 C115 C116: library part C0603
C121: library part C_0603
D1 D2 D3: library part DIODE, "Diode"
D4 D101 D102 D103: library part LED
D105: library part "DIODE SCHOTTKY", "Schottky Diode"
FB1 FB2 FB3 FB5 FB6 FB101 FB102 FB103 FB104 FB105 FB106: library part FB_0603
J3 J4: library part CON5, "Connector"
J101 J102 J103: library part CON3, "Connector"
L1 L2 L3 L4 L5 L6 L7 L8 L9 L10 L11 L12 L14 L15 L16 L17 L18 L19: library part INDUCTOR
L13: library part INDUCTOR, "INDUCTOR 18NH 5% 0603 SMD"
L102: library part INDUCTOR1
P1: library part "Header 5", "Header, 5-Pin"
Q1 Q3 Q4 Q5 Q6 Q7 Q8 Q10 Q101 Q102: library part NPN1, "NPN Transistor"
Q2 Q11: library part PNP1, "PNP Transistor"
R1 R2 R3 R4 R6 R8 R9 R10 R12 R16 R17 R37 R47 R49 R50 R54: library part R
R5 R7 R13 R14 R15 R18 R19 R20 R21 R22 R23 R24 R25 R26 R27 R28 R29 R30 R31 R33 R34 R35 R36 R38 R39 R40 R41 R42 R43 R46 R48 R51 R53 R55 R56: library part RESISTOR
R11 R52: library part POT1, "Potentiometer"
R32 R118 R119: library part R0402
R101 R102 R103 R104 R105 R106 R107 R108 R109 R110 R112 R122 R132 R133: library part R_603
R111 R120 R121 R126: library part R_0603
R113 R114 R115 R116 R117 R123: library part R0603
R130 R131: library part RES1
TP6: library part TP
TP119 TP120 TP121: library part TESTPOINT_1
U4 U8: library part OPAMP1
U6: library part AT-113A
U7: library part UPG152TA_0
U101 U103: library part PIC16F870
U102: library part PIC16F876A
U106: library part CRY-SMD-5-7
U108 U109: library part 7408_SINGLE, "Single AND Gate"
Y1 Y2: library part FILTER2
Y3 Y4 Y6: library part RESONATOR2
Y5: library part RESONATOR3

## Free pads (board coordinates)
  round 1.27 smd far side: 0(-20.93,14.249)
  round 1.27 smd: 0(-20.244,44.872)

## Via types
v1: diameter 0.559, hole 0.254, TopLayer to BottomLayer, tented both sides, 223 vias
v2: diameter 0.559, hole 0.254, TopLayer to BottomLayer, 7 vias

## Nets (pads, with @x,y where several pads share a name; then routed paths per layer and width w, separated by ;. In a path a pad name is that pad's centre, name@x,y a point inside that pad or via, vN(x,y) a via of type N, cw(c..) or ccw(c..) an arc to the next point about the centre after c; other vN are vias at no path point)
3.3VDC: C124.1 C301.1 FB103.1 L102.1 U107.4 U107.5 U109.5 | length 2.6
  BottomLayer w0.305: C301.1@-13.386,21.631 -12.929,21.631 -12.522,21.225 -12.522,20.539 v1(-12.337,20.354) U109.5@-11.724,20.354
  other v1: -10.795,7.636 -10.211,8.449 -9.042,8.458 -11.405,8.474 -7.874,8.474 15.443,15.535 16.307,16.069 12.141,16.475 11.405,17.821 11.379,19.65
16MHZ_CLKIN: C121.1 U101.9 U102.9 U103.9 U106.3 | length 83.7
  MidLayer4 w0.203: v1(-9.931,55.693) -9.373,56.252 -6.807,56.252 -3.658,53.102 1.6,53.102 2.653,52.049 6.183,52.049 8.534,49.698 13.106,49.698 v1(15.494,47.311) 15.011,46.828 15.011,36.059 v1(18.009,33.061)
  BottomLayer w0.203: U103.9@-13.36,56.321 -10.559,56.321 v1(-9.931,55.693) ; U102.9@0.737,28.395 -0.171,28.395 -0.457,28.108 -0.457,24.959 0.01,24.492 6.315,24.492 6.854,25.031 6.854,26.275 9.689,29.111 11.112,29.111 13.513,31.512 13.513,34.408 13.672,34.567 U101.9@14.732,34.567 16.503,34.567 v1(18.009,33.061)
  BottomLayer w0.305: v1(15.494,47.311) C121.1@15.494,48.276 16.18,48.276 16.485,47.971 16.485,47.565 17.145,46.904 U106.3@17.145,45.736
433_TX_DATA: J2.4 R22.2 R114.1 | length 91.9
  TopLayer w0.356: R22.2@-10.109,57.776 -10.1,57.785 v1(-10.1,59.1)
  MidLayer4 w0.203: v1(-23.368,56.988) -23.368,58.106 -19.152,62.322 -13.322,62.322 v1(-10.1,59.1) ; v1@-23.343,56.963 -23.343,14.342 -21.819,12.818 -16.002,12.818 -12.395,9.211 -5.182,9.211 J2.4@-3.81,10.582
  BottomLayer w0.203: v1(-23.368,56.988) -23.012,56.988 -19.152,53.127 R114.1@-16.713,53.127
916_RX_DATA: FB1.1 TP5.1 U3.4 | length 5.1
  TopLayer w0.356: U3.4@3.65,12.931 4.831,12.931 5.124,13.224 TP5.1@6.325,13.224 FB1.1@8.636,13.224
916_RX_FILTER_OUT: C38.2 U1.2 | length 5.1
  TopLayer w0.356: C38.2@-0.643,29.391 1.739,29.391 2.286,29.937 2.819,29.937 2.997,29.759 3.378,29.759 3.61,29.528 U1.2@3.61,29.053
916_TX_DATA: FB2.1 R40.1 | length 4.6
  TopLayer w0.356: FB2.1@-18.009,18.075 -17.984,18.1 v1(-16.9,18.1) ; v1(-15.959,19.891) -14.96,19.891 R40.1@-14.956,19.888 R40.1@-14.906,19.939
  MidLayer1 w0.356: v1(-16.9,18.1) -16.5,18.1 -15.959,18.641 v1(-15.959,19.891)
916RXDATA: FB1.2 J2.6 R123.1 | length 49.1
  TopLayer w0.305: J2.6@1.27,10.582 2.718,12.03 9.779,12.03 10.185,12.437 FB1.2@10.185,13.199 10.973,13.199 v1(11.303,12.868)
  MidLayer4 w0.203: v1(11.303,12.868) 13.284,14.85 13.97,14.85 15.215,13.605 16.408,13.605 16.942,14.138 16.942,14.977 21.565,19.599 21.565,28.794 19.355,31.004 19.355,37.938 19.888,38.472 v1(21.438,38.472)
  BottomLayer w0.203: R123.1@20.168,38.472 v1(21.438,38.472)
916TXDATA: FB2.2 J2.5 R122.2 | length 62.8
  TopLayer w0.356: FB2.2@-18.009,16.551 -16.051,16.551 -15.4,15.9 -15.4,14.6 -14.3,13.5 -12.6,13.5 -11.9,12.8 -4.039,12.8 -3.488,12.8 J2.5@-1.27,10.582
  MidLayer4 w0.203: J2.5@-1.27,10.582 1.092,12.945 1.092,20.209 4.216,23.333 7.595,23.333 13.284,29.023 13.284,32.198 5.944,39.538 v1(5.944,40.504)
  BottomLayer w0.203: R122.2@4.572,41.621 5.69,40.504 v1(5.944,40.504)
+5V: C18.1 C53.1 FB5.2 FB6.1 Q2.E R3.2 R5.1 R7.2 R19.1 R31.1 R34.1 R38.2 R41.2 R43.1 R47.2 R52.2 R53.2 U3.5 U4.5 U5.8 U8.5 U9.4 U9.8 | length 260.7
  TopLayer w0.305: Q2.E@-15.387,61.285 -16.307,60.365 -16.307,58.817 -16.002,58.512 -15.723,58.512 v1(-15.316,58.106) -15.011,58.106 -14.351,57.445 -14.351,56.15 -14.173,55.972 -13.03,55.972 -12.573,55.515 -12.294,55.515
  TopLayer w0.356: R43.1@-22.174,25.984 R43.1@-22.195,25.984 ; v1@-16.053,49.089 -21.869,49.089 -23.3,47.658 -23.3,26.297 -22.987,25.984 R43.1@-22.195,25.984 ; Q2.E@-15.387,61.285 -15.234,61.132 R19.1@-14.015,61.132 ; R34.1@-14.55,21.631 -14.55,21.478 -15.098,20.929 C53.1@-17.293,20.929 -17.293,19.598 ; R41.2@-13.444,16.691 -14.232,16.691 -14.638,16.284 ; -12.294,55.515 -11.684,55.515 -10.744,56.455 FB6.1@-10.744,56.607 ; R38.2@-9.075,24.539 -7.551,24.539 ; U9.8@-7.272,25.831 U9.8@-7.272,25.577 -7.272,24.819 -7.551,24.539 ; v1@-5.322,19.186 U9.4@-5.322,20.831 -5.322,23.275 -5.875,23.828 -6.84,23.828 -7.551,24.539 ; v1(-4.224,13.795) -4.232,13.787 R47.2@-5.369,13.787 -6.197,13.787 -6.535,14.125 ; R3.2@-2.979,18.875 -3.487,18.875 -4.808,17.554 v1(-5.316,17.554) -5.316,16.691 -6.535,15.471 -6.535,14.125 ; v1(2.304,14.836) U3.5@3.65,14.836 5.536,14.836 6.1,15.4 6.1,19.389 5.971,19.518 ; R53.2@3.883,52.34 R5.1@5.407,52.34 5.407,51.593 5.8,51.2 7.8,51.2 9.2,49.8 11,49.8 11.4,50.2 22.5,50.2 ; v1(4.7,56.7) 4.7,58.9 5.4,59.6 5.4,60.331 6.045,60.976 6.045,61.916 6.502,62.373 U5.8@7.67,62.373 8.473,62.373 9.1,63 11.3,63 11.6,62.7 20.599,62.7 23.7,59.599 23.7,51.4 22.5,50.2 ; U4.5@4.818,19.789 5.7,19.789 5.971,19.518 ; 5.8,19.689 5.971,19.518 ; 6.125,15.713 12.954,15.713 14.173,14.494 v1(16.002,14.494) ; C18.1@17.396,35.634 C18.1@17.357,35.674 R7.2@18.652,35.674 18.652,33.775 R52.2@19.785,32.642 ; v1(17.729,14.5) 21.1,14.5 21.6,15 21.6,20.7 21.19,21.11 ; U8.5@20.262,21.11 21.19,21.11 ; U8.5@20.317,21.085 U8.5@20.444,21.085 ; R43.1@-22.195,25.984 -22.195,24.961 -21.558,24.324 -21.558,20.055 -20.683,19.18 -17.711,19.18 -17.293,19.598 ; -17.293,19.598 -16.875,19.18 -16.48,19.18 -16,18.7 -16,17.646 -14.638,16.284 ; -14.638,16.284 -14.638,14.9 -13.938,14.2 -12.3,14.2 -11.616,13.516 -7.602,13.516 -7.331,13.787 -6.874,13.787 -6.535,14.125 ; R52.2@19.785,32.642 19.809,32.642 21.6,30.851 21.6,21.52 21.19,21.11 ; R52.2@19.785,32.642 20.636,33.493 R31.1@22.911,33.493 22.911,35.768 23.8,36.657 23.8,48.9 22.5,50.2
  MidLayer1 w0.356: v1(-5.316,17.554) v1(-5.316,19.18) ; v1(-4.224,13.795) -2.243,13.795 -1.201,14.836 v1(2.304,14.836) ; v1@16.008,14.5 v1(16.002,14.494) 17.723,14.494 v1(17.729,14.5)
  MidLayer4 w0.305: v1@-16.078,49.063 v1(-16.078,49.114) -16.078,57.344 v1(-15.316,58.106) -14.986,58.436 -9.779,58.436 -8.611,59.604 -6.782,59.604 -3.877,56.7 v1(4.7,56.7)
  other v1: 4.064,15.621 5.105,15.621 5.385,16.434
+DIA: U102.22 U103.22 | length 35.5
  BottomLayer w0.203: U102.22@-7.724,29.695 U102.22@-7.063,29.695 -5.881,29.695 -4.902,30.674 -4.902,37.786 -3.454,39.234 -3.454,42.688 -1.067,45.076 -1.067,51.984 0.533,53.585 0.533,54.296 0.305,54.524 -2.057,54.524 -2.565,55.032 U103.22@-5.549,55.032
+X433MHZ: C111.1 R114.2 U103.2 | length 3.2
  BottomLayer w0.203: R114.2@-15.179,53.117 -15.179,51.771 U103.2@-13.36,51.771
+X916: C112.1 R122.1 U101.26 | length 5.4
  BottomLayer w0.203: R122.1@3.048,41.621 4.47,40.199 C112.1@4.572,40.199 ; C112.1@4.47,40.097 4.47,39.843 5.847,38.467 U101.26@6.932,38.467
-3.3VDC-: FB103.2 P1.1
-GND_COM-: FB101.2 FB102.2 P1.5
-R916: C113.1 R110.2 R123.2 U101.3 | length 7.9
  BottomLayer w0.203: U101.3@14.732,38.467 R123.2@18.639,38.467 ; R110.2@17.323,36.668 18.644,37.989 R123.2@18.644,38.472 C113.1@18.644,40.072
"-XD IN-": FB105.2 P1.3 | length 2.4
  TopLayer w0.203: P1.3@-3.835,3.48 FB105.2@-3.835,5.918
"-XD OUT-": FB104.2 P1.2 | length 2.4
  TopLayer w0.203: P1.2@-6.375,3.48 FB104.2@-6.375,5.918
_RSSI: FB3.2 J2.7 R115.1 | length 66.4
  TopLayer w0.305: J2.7@3.81,10.582 5.309,9.084 12.484,9.084 16.891,13.491 16.891,14.9 17.653,15.662
  TopLayer w0.356: 17.653,15.662 FB3.2@18.948,15.662
  MidLayer4 w0.203: J2.7@3.81,10.582 2.87,11.522 2.87,16.129 5.74,18.999 15.656,18.999 18.694,22.038 18.694,38.472 20.726,40.504 v1(20.726,41.215)
  BottomLayer w0.203: R115.1@18.237,41.443 18.771,41.977 19.761,41.977 v1@20.523,41.215
AGC: D2.K R6.1 R46.1 | length 31.4
  TopLayer w0.254: R46.1@-0.643,27.867 -1.07,27.867 -1.4,28.197 -1.4,29.848 -1.171,30.076 1.676,30.076 2.121,30.521 2.921,30.521 3.124,30.318 6.032,30.318 6.121,30.229 7.109,30.229 7.617,29.721 8.76,29.721 8.887,29.594 8.887,24.768 9.014,24.641
  TopLayer w0.356: 9.014,24.641 9.776,23.879 11.935,23.879 12.443,24.387 12.443,27.943 13.586,29.086 R6.1@15.11,29.086 16.634,29.086 D2.K@17.142,28.578
BLED: R119.2 U102.7 | length 3.5
  BottomLayer w0.203: U102.7@0.737,29.695 1.866,29.695 2.21,30.039 2.856,30.039 3.2,29.695 R119.2@3.976,29.695
CMC: J101.3 Q101.C R101.2 U101.1 | length 19.4
  BottomLayer w0.203: R101.2@5.08,48.733 J101.3@6.934,48.733 ; Q101.C@6.934,50.892 J101.3@6.934,48.733 ; U101.1@14.732,39.767 14.732,44.466 13.868,45.33 9.652,45.33 8.534,46.447 8.534,48.327 8.128,48.733 J101.3@6.934,48.733
CRB6: J101.2 U101.27 | length 8.8
  BottomLayer w0.203: U101.27@6.932,39.117 7.91,39.117 8.255,39.462 8.255,40.377 7.925,40.707 7.925,42.367 8.052,42.494 8.052,45.076 J101.2@6.934,46.193
CRB7: J101.1 U101.28 | length 3.9
  BottomLayer w0.203: U101.28@6.932,39.767 J101.1@6.932,43.651
D0: U101.11 U102.2 | length 41.8
  BottomLayer w0.203: U102.2@0.076,32.945 -1.158,32.945 ; U102.2@0.737,32.945 -1.158,32.945 ; U101.11@14.732,33.267 16.482,33.267 17.12,32.63 17.12,30.623 16.256,29.759 14.453,29.759 7.468,22.774 -2.083,22.774 -2.718,23.409 -2.718,24.705 -2.134,25.289 -2.134,29.734 -2.718,30.318 -2.718,31.385 -1.158,32.945
D1: U101.12 U102.3 | length 37.2
  BottomLayer w0.203: U102.3@0.737,32.295 -1.122,32.295 -2.261,31.156 -2.261,30.496 -1.702,29.937 -1.702,25.01 -2.261,24.451 -2.261,23.562 -1.905,23.206 7.188,23.206 14.224,30.242 16.002,30.242 16.637,30.877 16.637,32.249 16.269,32.617 U101.12@14.732,32.617
D2: U101.13 U102.4 | length 32.9
  BottomLayer w0.203: U102.4@0.076,31.645 -0.426,31.645 ; U102.4@0.737,31.645 -0.426,31.645 ; U101.13@14.732,31.967 15.877,31.967 16.129,31.715 16.129,31.106 15.697,30.674 14.046,30.674 11.607,28.234 10.184,28.234 7.849,25.899 7.849,24.578 6.883,23.613 -0.33,23.613 -1.27,24.552 -1.27,28.87 -0.965,29.175 -0.965,31.106 -0.426,31.645
D3: U101.14 U102.5 | length 27.1
  BottomLayer w0.203: U102.5@0.737,30.995 -0.238,30.995 -0.483,30.75 -0.483,28.87 -0.864,28.489 -0.864,24.73 -0.203,24.07 6.604,24.07 7.341,24.806 7.341,26.051 9.957,28.667 11.328,28.667 13.978,31.317 U101.14@14.732,31.317
D4: U101.15 U102.11 | length 9.9
  BottomLayer w0.203: U102.11@0.076,27.095 U102.11@0.737,27.095 1.679,27.095 2.286,27.702 5.588,27.702 6.932,29.046 U101.15@6.932,31.317
D5: U101.16 U102.12 | length 12.9
  BottomLayer w0.203: U102.12@0.076,26.445 U102.12@0.737,26.445 4.966,26.445 8.23,29.709 8.23,31.688 7.95,31.967 U101.16@6.932,31.967
D6: U101.17 U102.13 | length 14.7
  BottomLayer w0.203: U102.13@0.076,25.795 U102.13@0.737,25.795 4.976,25.795 8.788,29.607 8.788,31.906 8.077,32.617 U101.17@6.932,32.617
D7: U101.18 U102.14 | length 16.7
  BottomLayer w0.203: U102.14@0.076,25.145 U102.14@0.737,25.145 5.063,25.145 9.322,29.404 9.322,32.294 8.349,33.267 U101.18@6.932,33.267
DMC: J102.3 R103.2 R112.2 U102.1 | length 75.7
  TopLayer w0.203: R112.2@-1.295,7.188 -0.61,7.188 -0.356,6.934 v2(2.108,6.934)
  MidLayer4 w0.203: v1(-10.109,40.808) -10.109,39.335 -6.02,35.246 -3.886,35.246 ; v1(-1.626,35.246) -3.886,35.246 ; v2@2.134,6.934 -0.94,6.934 -2.565,8.56 -2.565,11.608 -1.6,12.573 -0.254,12.573 0.61,13.437 0.61,21.184 5.715,26.289 8.077,26.289 11.887,30.099 11.887,32.334 11.836,32.334 11.532,32.639 -2.667,32.639 -3.886,33.858 -3.886,35.246
  BottomLayer w0.203: v1(-10.109,40.808) J102.3@-8.89,40.808 ; v1(-1.626,35.246) -1.372,35.5 R103.2@-0.457,35.5 -0.457,33.925 -0.127,33.595 U102.1@0.737,33.595
DPCS: C110.1 R113.2 U103.13 | length 3.6
  BottomLayer w0.203: C110.1@-14.91,61.128 R113.2@-14.91,59.833 -14.91,59.173 -14.658,58.921 U103.13@-13.36,58.921
DPINC: C116.1 R117.2 U103.15 | length 4
  BottomLayer w0.203: U103.15@-5.56,59.571 -4.834,59.571 -4.394,60.011 C116.1@-3.277,60.011 R117.2@-3.277,61.509
"DPOT UP/~DOWN": J2.9 R116.1 U5.2 | length 99.1
  TopLayer w0.356: U5.2@2.924,61.723 v1@4.739,61.723
  MidLayer4 w0.203: v1(4.775,61.687) 11.405,61.687 11.963,62.246 21.158,62.246 22.2,61.205 22.2,13.681 21.539,13.021 14.224,13.021 12.852,13.021 11.836,12.005 ; J2.9@8.89,10.582 10.287,11.979 11.836,11.979
  BottomLayer w0.203: R116.1@-11.811,62.348 0.711,62.348 0.951,62.588 2.173,62.588 3.073,61.687 v1(4.775,61.687)
"DPOT ~CS": J2.1 R48.2 R113.1 | length 89.4
  TopLayer w0.305: R48.2@-0.305,51.299 v1@0.991,51.299
  MidLayer4 w0.203: v1(-18.796,60.29) -18.796,59.35 -20.015,58.131 -20.015,49.521 v1(-21.819,47.717) -22.758,46.777 -22.758,14.596 -21.539,13.376 -14.224,13.376 J2.1@-11.43,10.582 ; v1(-11.024,48.682) -8.509,48.682 -5.893,51.299 v1(1.016,51.299)
  BottomLayer w0.203: v1(-21.819,47.717) -19.71,49.825 -15.316,49.825 -14.173,48.682 v1(-11.024,48.682) ; v1(-18.796,60.29) -17.475,60.29 -17.018,59.833 R113.1@-16.434,59.833
"DPOT ~INC": J2.10 R31.2 R117.1 U5.1 | length 89.4
  TopLayer w0.356: v1(1.499,61.941) 1.93,62.373 U5.1@2.924,62.373 ; v1(22.911,30.623) R31.2@22.911,31.969
  MidLayer4 w0.203: v1(1.499,61.941) 1.956,62.398 11.201,62.398 11.633,62.83 21.514,62.83 22.911,61.433 v1(22.911,30.623) 22.911,13.453 21.869,12.411 14.529,12.411 12.7,10.582 J2.10@11.43,10.582
  BottomLayer w0.356: R117.1@-1.753,61.509 1.067,61.509 v1(1.499,61.941)
DPUD: C115.1 R116.2 U103.14 | length 4.3
  BottomLayer w0.203: C115.1@-14.91,62.348 -13.386,62.348 -13.36,62.322 U103.14@-13.36,59.571
DRB2: U102.23 U103.23 | length 30.2
  BottomLayer w0.203: U102.23@-7.724,30.345 U102.23@-7.063,30.345 -6.019,30.345 -5.385,30.979 -5.385,39.665 -3.937,41.113 -3.937,43.018 -2.845,44.11 -2.845,52.365 -2.489,52.721 -2.489,54.194 -2.769,54.474 -3.962,54.474 -4.064,54.372 U103.23@-5.559,54.372
DRB4: R107.1 R120.1 R121.1 U102.25 | length 39.9
  MidLayer4 w0.203: v1(-4.572,48.886) 2.642,48.886 4.369,50.613 v1(5.055,50.613)
  BottomLayer w0.203: U102.25@-7.063,31.645 -7.88,31.645 -8.23,31.995 -9.5,31.995 -9.855,31.639 R107.1@-11.532,31.639 -11.532,33.214 -11.709,33.392 R121.1@-11.709,42.383 -7.29,42.383 -5.537,44.136 -5.537,47.92 v1(-4.572,48.886) ; R120.1@3.861,51.4 3.861,50.689 3.937,50.613 v1(5.055,50.613)
DRB6: J102.2 U102.27 | length 7.6
  BottomLayer w0.203: J102.2@-8.89,38.268 -7.722,37.1 -7.722,35.754 -5.867,33.9 -5.867,33.163 -6.086,32.945 U102.27@-7.063,32.945
DRB7: J102.1 U102.28 | length 3.5
  BottomLayer w0.203: J102.1@-8.89,35.728 -8.89,34.408 -8.077,33.595 U102.28@-7.063,33.595
EMC: J103.3 Q102.C R105.2 U103.1 | length 11.2
  BottomLayer w0.203: R105.2@-15.037,47.489 Q102.C@-12.675,47.489 -10.566,47.489 -9.5,48.555 -10.312,49.368 -12.065,49.368 -13.36,50.664 U103.1@-13.36,51.121
ERB6: J103.2 U103.27 | length 8.4
  BottomLayer w0.203: J103.2@-9.5,46.015 -8.204,47.311 -8.204,50.933 -7.366,51.771 U103.27@-5.56,51.771
ERB7: J103.1 U103.28 | length 9.3
  BottomLayer w0.203: J103.1@-9.5,43.475 -7.976,44.999 -7.976,45.618 -6.045,47.549 -6.045,49.936 -5.563,50.419 -5.563,51.119 U103.28@-5.56,51.121
GLED: R118.2 U102.6 U103.6 | length 57.5
  MidLayer4 w0.203: v1(-11.811,53.889) -12.243,53.889 -12.522,53.61 -12.522,29.302 -8.23,25.01 2.464,25.01 3.886,26.432 3.886,27.854 v1(5.715,29.683)
  BottomLayer w0.203: R118.2@-15.342,55.313 -14.4,54.371 U103.6@-13.36,54.371 -12.546,54.371 -12.065,53.889 v1(-11.811,53.889) ; U102.6@0.737,30.345 1.754,30.345 1.956,30.547 3.099,30.547 3.226,30.42 4.978,30.42 v1(5.715,29.683)
GND_COM: C101.2 C102.2 C107.2 C109.2 C110.2 C111.2 C112.2 C113.2 C114.2 C115.2 C116.2 C124.2 C125.2 C301.2 C302.2 C303.2 D4.K FB102.1 Q101.E Q102.E R102.2 R104.1 R106.2 R107.2 R108.1 R126.2 R131.1 TP120.1 U101.8 U101.19 U102.8 U102.19 U103.3 U103.4 U103.5 U103.7 U103.8 U103.19 U106.2 U107.2 U108.3 U109.3 | length 88.5
  BottomLayer w0.305: U108.3@-16.761,24.171 C302.2@-17.932,24.171 -17.932,22.52 -17.145,21.733 v1(-16.154,21.733) ; v1(-16.739,50.74) C111.2@-16.739,51.756 ; C110.2@-16.434,61.128 -17.094,61.128 v1(-17.602,61.636) -17.602,62.017 -17.272,62.348 C115.2@-16.434,62.348 ; v1(-13.919,30.699) -13.462,30.242 R104.1@-13.056,30.242 ; v1(-13.614,42.332) Q102.E@-13.614,45.457 ; U103.3@-13.36,52.421 -11.984,52.421 -11.811,52.594 v1(-11.811,53.051) ; U103.4@-13.36,53.071 -12.319,53.071 ; U103.5@-13.36,53.721 -12.633,53.721 -12.319,53.407 -12.319,53.071 ; U103.7@-13.36,55.021 -12.434,55.021 -12.141,54.728 v1(-11.836,54.728) -11.836,55.261 -12.246,55.671 U103.8@-13.36,55.671 ; R107.2@-13.056,31.639 R104.1@-13.056,30.242 ; v1@-11.831,53.071 -12.319,53.071 ; R108.1@-11.557,25.035 -12.827,25.035 -13.386,24.476 C301.2@-13.386,23.155 -12.7,23.155 -12.471,22.927 -12.471,22.089 -11.913,21.53 -10.643,21.53 -10.424,21.748 ; U109.3@-10.424,22.554 -10.424,21.748 ; v1(-9.779,21.454) -10.13,21.454 -10.424,21.748 ; v1@-9.365,56.971 U103.19@-5.56,56.971 ; U102.19@-7.063,27.745 -9.423,27.745 -9.711,28.032 -12.802,28.032 -13.056,28.286 C107.2@-13.056,28.896 R104.1@-13.056,30.242 ; R106.2@-1.753,53.712 -0.305,53.712 v1(-0.102,53.915) ; C101.2@-1.753,56.683 -1.041,56.683 v1(-0.102,55.744) ; C116.2@-1.753,60.011 1.575,60.011 v1(1.803,59.782) ; v2(0.33,38.405) 0.33,38.954 TP120.1@1.016,39.64 1.803,39.64 2.349,40.186 C112.2@3.035,40.186 ; v1(5.639,31.614) 5.258,31.995 C102.2@5.258,32.884 5.258,33.011 6.164,33.917 U101.19@6.932,33.917 ; Q101.E@7.874,52.924 9.068,52.924 v1@10.279,54.135 ; v1(8.839,43.45) 9.576,43.45 10.262,42.764 R102.2@10.262,41.672 ; v1(10.262,54.127) D4.K@10.262,55.313 ; R126.2@12.522,49.8 12.522,50.486 C109.2@13.132,51.095 13.132,51.476 v1(12.548,52.061) ; v1(12.598,31.741) 12.598,34.738 13.078,35.217 U101.8@14.732,35.217 ; C303.2@14.122,24.959 v1(15.088,24.959) ; C114.2@18.237,43.12 20.117,43.12 20.726,42.51 v1(20.726,42.053) ; v1(19.99,47.336) 19.99,46.193 20.447,45.736 U106.2@21.717,45.736 21.59,45.609 v1(21.59,42.078) ; C113.2@20.168,40.072 20.853,40.072 20.955,40.173 v1@21.463,40.173
  BottomLayer w0.356: U102.8@0.737,29.045 2.333,29.045 v1(2.464,29.175)
  other v1: 6.96,7.052 9.119,7.077 6.96,8.119 8.052,8.144 9.119,8.144 13.31,13.935 8.763,14.113 10.109,14.113 12.344,14.9 13.716,16.551 9.957,16.628 15.646,16.856 15.824,18.126 21.488,40.199 -9.373,56.963